# EAGLE board NinjaPCB_ver2.0-panel2x3-GTP (EAGLE 6.6.0), part 1 of 4
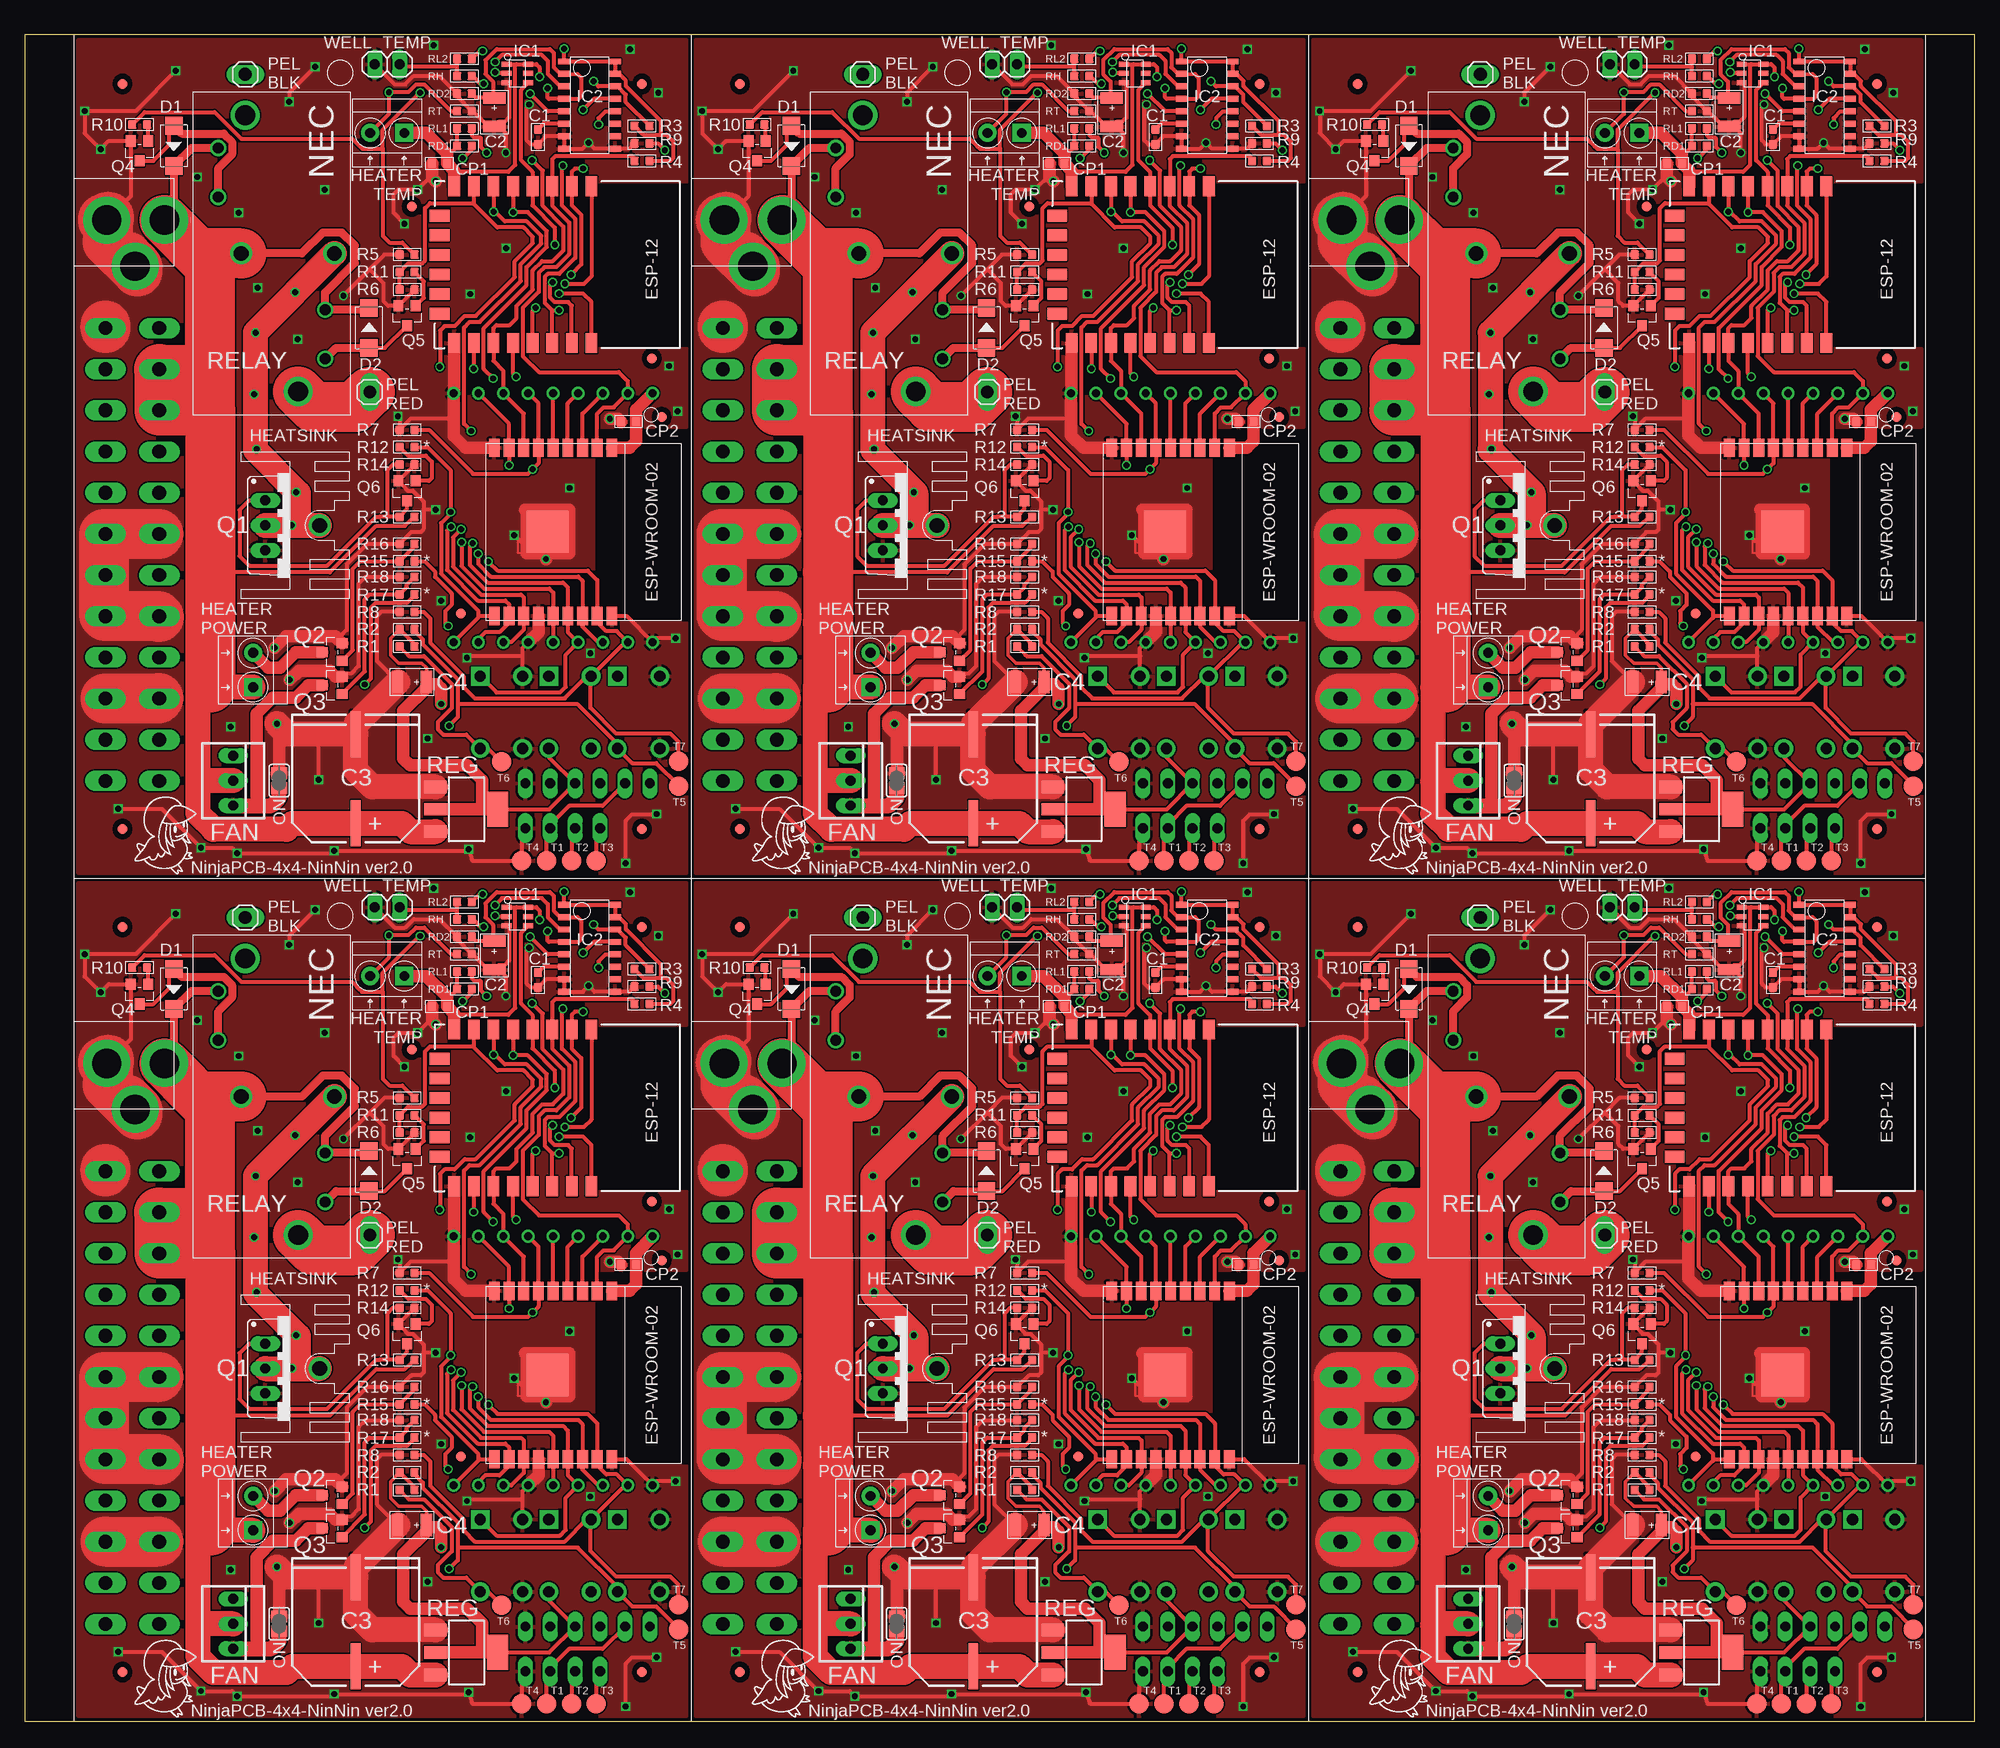
[diagram p0: board, top side]
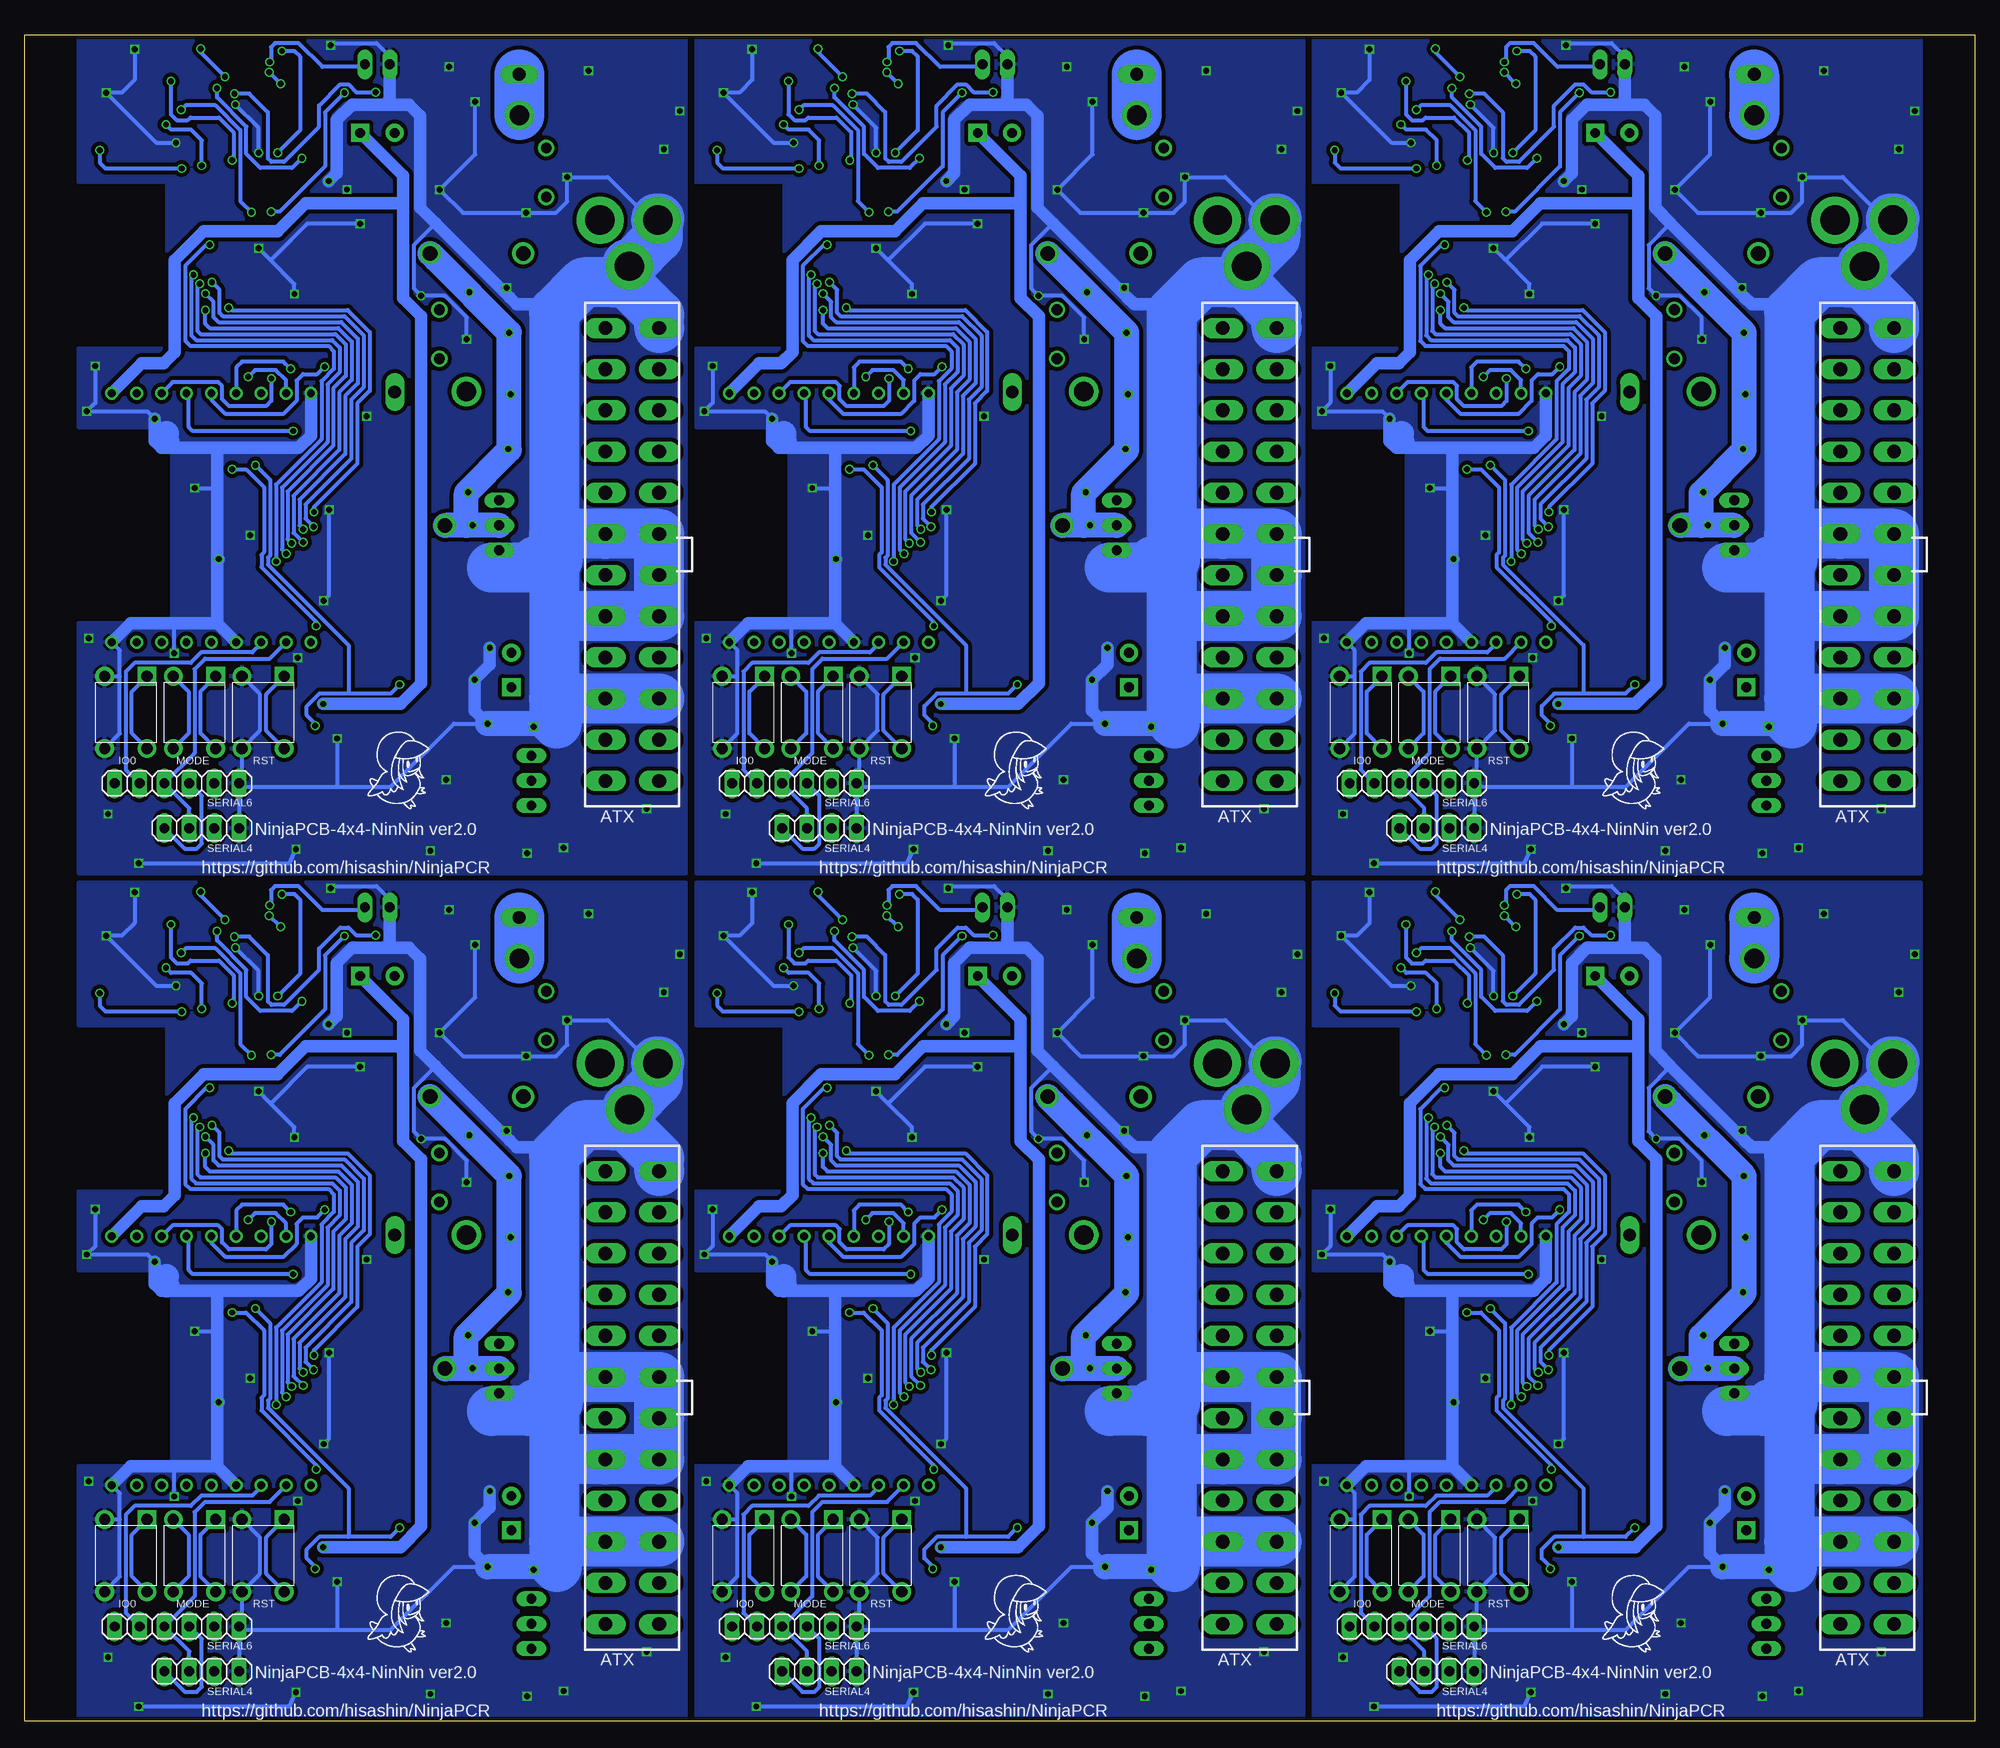
[diagram p1: board, bottom side, seen from below]

Size 199 x 172 mm. Coordinates in mm from the lower left corner, seen from the top.
Outline: 199,172 0,172 0,0 199,0 199,172
Copper layers (1*16): Top 0.035mm / dielectric 1.5mm / Bottom 0.035mm
Design rules "SeeedStudio_2layer_DRU_no_angle_20140221": minimum track width 6mil, minimum drill 12mil, track to track 6mil, track to pad 6mil, pad to pad 6mil, via to via 6mil, smd to smd 0mil, copper to edge 10mil, drill to drill 10mil, minimum pad ring 10mil, minimum via ring 6mil, stop-mask expansion 2mil, vias tented up to drill 100mil, thermal gap 10mil

## Footprints (pad centres in the part's own frame; a part is rotated, then mirrored left to right if it is on the bottom)
ATX24 = drill 1.4 long: 1 23.1,-2.75; 2 18.9,-2.75; 3 14.7,-2.75; 4 10.5,-2.75; 5 6.3,-2.75; 6 2.1,-2.75; 7 -2.1,-2.75; 8 -6.3,-2.75; 9 -10.5,-2.75; 10 -14.7,-2.75; 11 -18.9,-2.75; 12 -23.1,-2.75; 13 23.1,2.75; 14 18.9,2.75; 15 14.7,2.75; 16 10.5,2.75; 17 6.3,2.75; 18 2.1,2.75; 19 -2.1,2.75; 20 -6.3,2.75; 21 -10.5,2.75; 22 -14.7,2.75; 23 -18.9,2.75; 24 -23.1,2.75
C0603 = smd 0.889 x 0.889: 1 0,0.762; 2 0,-0.762
AVX-B = smd 1.143 x 2.286: + -1.46,0; - 1.46,0
CAP_SMD_AL_D125 = smd 1 x 4.7: P$M 0,-4.55; P$P 0,4.55
DO-214AC = smd 1.8 x 1.77: 1 -2.042,0; 2 2.042,0
ESP-12F = smd 2 x 1.2: 1 -8,3.48; 2 -8,1.48; 3 -8,-0.52; 4 -8,-2.52; 5 -8,-4.52; 6 -8,-6.52; 7 -8,-8.52; 8 -8,-10.52; 15 8,-10.52; 16 8,-8.52; 17 8,-6.52; 18 8,-4.52; 19 8,-2.52; 20 8,-0.52; 21 8,1.48; 22 8,3.48 | smd 1.2 x 2: 9 -5,-12; 10 -3,-12; 11 -1,-12; 12 1,-12; 13 3,-12; 14 5,-12
ESP-WROOM-02 = smd 1.85 x 1.1: P$1 -8.575,12.9; P$2 -8.575,11.4; P$3 -8.575,9.9; P$4 -8.575,8.4; P$5 -8.575,6.9; P$6 -8.575,5.4; P$7 -8.575,3.9; P$8 -8.575,2.4; P$9 -8.575,0.9; P$10 8.575,0.9; P$11 8.575,2.4; P$12 8.575,3.9; P$13 8.575,5.4; P$14 8.575,6.9; P$15 8.575,8.4; P$16 8.575,9.9; P$17 8.575,11.4; P$18 8.575,12.9 | smd 4.3 x 4.3: P$19 0,6.33
ESP-WROOM-02-BREAK-NODETAIL = drill 0.8: P$1 -12.7,10.16; P$2 -12.7,7.62; P$3 -12.7,5.08; P$4 -12.7,2.54; P$5 -12.7,0; P$6 -12.7,-2.54; P$7 -12.7,-5.08; P$8 -12.7,-7.62; P$9 -12.7,-10.16; P$10 12.7,-10.16; P$11 12.7,-7.62; P$12 12.7,-5.08; P$13 12.7,-2.54; P$14 12.7,0; P$15 12.7,2.54; P$16 12.7,5.08; P$17 12.7,7.62; P$18 12.7,10.16
22-23-2031 = drill 1 long: 1 -2.54,0; 2 0,0; 3 2.54,0
SJ = smd 1.168 x 1.6: 1 -0.762,0; 2 0.762,0
H2-3.5-7.0X7.0MM = drill 1 pad 1.85 square: 1 -1.75,0 | drill 1 pad 1.85: 2 1.75,0
HEAT11PB015 = drill 1.5: P$1 0,3
SOT-23-6 = smd 0.5 x 1: P$1 -0.95,-1.1; P$2 0,-1.1; P$3 0.95,-1.1; P$4 0.95,1.1; P$5 0,1.1; P$6 -0.95,1.1
SOP-16 = smd 0.6 x 1.2: P$1 -4.445,-2.6; P$2 -3.175,-2.6; P$3 -1.905,-2.6; P$4 -0.635,-2.6; P$5 0.635,-2.6; P$6 1.905,-2.6; P$7 3.175,-2.6; P$8 4.445,-2.6; P$9 4.445,2.6; P$10 3.175,2.6; P$11 1.905,2.6; P$12 0.635,2.6; P$13 -0.635,2.6; P$14 -1.905,2.6; P$15 -3.175,2.6; P$16 -4.445,2.6
SW4-6.0X6.0X5.0MM = drill 1.143 pad 1.905 square: 1 -3.683,2.159 | drill 1.143 pad 1.905: 2 -3.683,-2.159; 3 3.683,-2.159; 4 3.683,2.159
PJ-102A-NOOUT = drill 3 pad 4.8: RING 0.1,-3.39; RING_SW -4.6,-6.29; TIP 0.1,-9.29
1X01LONG = drill 1.3 long: 1 0,0
TO220BV = drill 1.016 long: D 0,-2.54; G -2.54,-2.54; S 2.54,-2.54
SOT-23 = smd 1.016 x 1.143: 1 -0.889,-1.016; 2 0.889,-1.016; 3 0,1.016
R0603 = smd 0.889 x 0.889: 1 0,0.762; 2 0,-0.762
SOT-223 = smd 1.27 x 2.286: 1 -2.286,-3.175; 2 0,-3.175; 3 2.286,-3.175 | smd 3.556 x 2.159: TER 0,3.175
NEC-EP2 = drill 2: P$1 -14.1,-2.7; P$8 14.1,2.7 | drill 1.1: P$2 -10.75,-5.45; P$3 -5.75,-5.45; P$6 5.75,5.45; P$7 10.75,5.45 | drill 1.5: P$4 0,-3.1; P$5 0,6.4
1X06 = drill 1.016 long: 1 -6.35,0; 2 -3.81,0; 3 -1.27,0; 4 1.27,0; 5 3.81,0; 6 6.35,0
1X04 = drill 1.016 long: 1 -3.81,0; 2 -1.27,0; 3 1.27,0; 4 3.81,0
TP20R = smd 2 x 2: TP 0,0
FIDUCIAL_1MM = smd 1 x 1: 1 0,0
1X02 = drill 1.016 long: 1 -1.27,0; 2 1.27,0

## Placement (x,y rotation side)
ATX  ATX24NH  [ATX24]  11,33 270 bottom
ATX1  ATX24NH  [ATX24]  74,33 270 bottom
ATX2  ATX24NH  [ATX24]  137,33 270 bottom
ATX3  ATX24NH  [ATX24]  11,119 270 bottom
ATX4  ATX24NH  [ATX24]  74,119 270 bottom
ATX5  ATX24NH  [ATX24]  137,119 270 bottom
C1  100nf  [C0603]  52.39,75.6 180 top
C2  22uf  [AVX-B]  47.93,78.11 270 top
C3  CAP_SMDAL_1000UF_25V  [CAP_SMD_AL_D125]  33.79,10.13 180 top
C4  22uf  [AVX-B]  39.54,19.99 180 top
C5  22uf  [AVX-B]  102.54,19.99 180 top
C6  CAP_SMDAL_1000UF_25V  [CAP_SMD_AL_D125]  96.79,10.13 180 top
C7  100nf  [C0603]  115.39,75.6 180 top
C8  22uf  [AVX-B]  110.93,78.11 270 top
C9  22uf  [AVX-B]  165.54,19.99 180 top
C10  CAP_SMDAL_1000UF_25V  [CAP_SMD_AL_D125]  159.79,10.13 180 top
C11  100nf  [C0603]  178.39,75.6 180 top
C12  22uf  [AVX-B]  173.93,78.11 270 top
C13  22uf  [AVX-B]  39.54,105.99 180 top
C14  CAP_SMDAL_1000UF_25V  [CAP_SMD_AL_D125]  33.79,96.13 180 top
C15  100nf  [C0603]  52.39,161.6 180 top
C16  22uf  [AVX-B]  47.93,164.1 270 top
C17  22uf  [AVX-B]  102.54,105.99 180 top
C18  CAP_SMDAL_1000UF_25V  [CAP_SMD_AL_D125]  96.79,96.13 180 top
C19  100nf  [C0603]  115.39,161.6 180 top
C20  22uf  [AVX-B]  110.93,164.1 270 top
C21  22uf  [AVX-B]  165.54,105.99 180 top
C22  CAP_SMDAL_1000UF_25V  [CAP_SMD_AL_D125]  159.79,96.13 180 top
C23  100nf  [C0603]  178.39,161.6 180 top
C24  22uf  [AVX-B]  173.93,164.1 270 top
CP1  100nf  [C0603]  42.34,72.9 270 top
CP2  100nf  [C0603]  61.63,46.56 90 top
CP3  100nf  [C0603]  105.34,72.9 270 top
CP4  100nf  [C0603]  124.63,46.56 90 top
CP5  100nf  [C0603]  168.34,72.9 270 top
CP6  100nf  [C0603]  187.63,46.56 90 top
CP7  100nf  [C0603]  42.34,158.9 270 top
CP8  100nf  [C0603]  61.63,132.56 90 top
CP9  100nf  [C0603]  105.34,158.9 270 top
CP10  100nf  [C0603]  124.63,132.56 90 top
CP11  100nf  [C0603]  168.34,158.9 270 top
CP12  100nf  [C0603]  187.63,132.56 90 top
D1  1N4007  [DO-214AC]  15.24,74.68 270 top
D2  1N4007  [DO-214AC]  35.15,56.11 90 top
D3  1N4007  [DO-214AC]  78.24,74.68 270 top
D4  1N4007  [DO-214AC]  98.15,56.11 90 top
D5  1N4007  [DO-214AC]  141.24,74.68 270 top
D6  1N4007  [DO-214AC]  161.15,56.11 90 top
D7  1N4007  [DO-214AC]  15.24,160.68 270 top
D8  1N4007  [DO-214AC]  35.15,142.11 90 top
D9  1N4007  [DO-214AC]  78.24,160.68 270 top
D10  1N4007  [DO-214AC]  98.15,142.11 90 top
D11  1N4007  [DO-214AC]  141.24,160.68 270 top
D12  1N4007  [DO-214AC]  161.15,142.11 90 top
ESP-1  ESP-12F  [ESP-12F]  117.36,62.56 270 top
ESP-2  ESP-12F  [ESP-12F]  180.36,62.56 270 top
ESP-3  ESP-12F  [ESP-12F]  54.36,148.56 270 top
ESP-4  ESP-12F  [ESP-12F]  117.36,148.56 270 top
ESP-5  ESP-12F  [ESP-12F]  180.36,148.56 270 top
ESP-12  ESP-12F  [ESP-12F]  54.36,62.56 270 top
ESP-WROOM-01  ESP-WROOM-02  [ESP-WROOM-02]  110.03,35.3 270 top
ESP-WROOM-02  ESP-WROOM-02  [ESP-WROOM-02]  47.03,35.3 270 top
ESP-WROOM-02-BREAK  ESP-WROOM-02-BREAKND  [ESP-WROOM-02-BREAK-NODETAIL]  53.93,36.75 270 top
ESP-WROOM-02-BREAK1  ESP-WROOM-02-BREAKND  [ESP-WROOM-02-BREAK-NODETAIL]  116.93,36.75 270 top
ESP-WROOM-02-BREAK2  ESP-WROOM-02-BREAKND  [ESP-WROOM-02-BREAK-NODETAIL]  179.93,36.75 270 top
ESP-WROOM-02-BREAK3  ESP-WROOM-02-BREAKND  [ESP-WROOM-02-BREAK-NODETAIL]  53.93,122.75 270 top
ESP-WROOM-02-BREAK4  ESP-WROOM-02-BREAKND  [ESP-WROOM-02-BREAK-NODETAIL]  116.93,122.75 270 top
ESP-WROOM-02-BREAK5  ESP-WROOM-02-BREAKND  [ESP-WROOM-02-BREAK-NODETAIL]  179.93,122.75 270 top
ESP-WROOM-03  ESP-WROOM-02  [ESP-WROOM-02]  173.03,35.3 270 top
ESP-WROOM-04  ESP-WROOM-02  [ESP-WROOM-02]  47.03,121.3 270 top
ESP-WROOM-05  ESP-WROOM-02  [ESP-WROOM-02]  110.03,121.3 270 top
ESP-WROOM-06  ESP-WROOM-02  [ESP-WROOM-02]  173.03,121.3 270 top
FAN  22-23-2031  [22-23-2031]  21.29,9.93 270 top
FAN1  22-23-2031  [22-23-2031]  84.29,9.93 270 top
FAN2  22-23-2031  [22-23-2031]  147.29,9.93 270 top
FAN3  22-23-2031  [22-23-2031]  21.29,95.93 270 top
FAN4  22-23-2031  [22-23-2031]  84.29,95.93 270 top
FAN5  22-23-2031  [22-23-2031]  147.29,95.93 270 top
FAN_ON  [SJ]  25.98,9.93 270 top
FAN_ON1  [SJ]  88.98,9.93 270 top
FAN_ON2  [SJ]  151.98,9.93 270 top
FAN_ON3  [SJ]  25.98,95.93 270 top
FAN_ON4  [SJ]  88.98,95.93 270 top
FAN_ON5  [SJ]  151.98,95.93 270 top
HEATER_POWER  [H2-3.5-7.0X7.0MM]  23.32,21.22 90 top
HEATER_POWER1  [H2-3.5-7.0X7.0MM]  86.32,21.22 90 top
HEATER_POWER2  [H2-3.5-7.0X7.0MM]  149.32,21.22 90 top
HEATER_POWER3  [H2-3.5-7.0X7.0MM]  23.32,107.22 90 top
HEATER_POWER4  [H2-3.5-7.0X7.0MM]  86.32,107.22 90 top
HEATER_POWER5  [H2-3.5-7.0X7.0MM]  149.32,107.22 90 top
HEATER_TEMP  [H2-3.5-7.0X7.0MM]  37,76 180 top
HEATER_TEMP1  [H2-3.5-7.0X7.0MM]  100,76 180 top
HEATER_TEMP2  [H2-3.5-7.0X7.0MM]  163,76 180 top
HEATER_TEMP3  [H2-3.5-7.0X7.0MM]  37,162 180 top
HEATER_TEMP4  [H2-3.5-7.0X7.0MM]  100,162 180 top
HEATER_TEMP5  [H2-3.5-7.0X7.0MM]  163,162 180 top
HEATSINK  HEAT111PB015  [HEAT11PB015]  27.11,35.97 270 top
HEATSINK1  HEAT111PB015  [HEAT11PB015]  90.11,35.97 270 top
HEATSINK2  HEAT111PB015  [HEAT11PB015]  153.11,35.97 270 top
HEATSINK3  HEAT111PB015  [HEAT11PB015]  27.11,121.97 270 top
HEATSINK4  HEAT111PB015  [HEAT11PB015]  90.11,121.97 270 top
HEATSINK5  HEAT111PB015  [HEAT11PB015]  153.11,121.97 270 top
IC1  ANALOGSW_AD_SOT23-6  [SOT-23-6]  50.29,82.07 270 top
IC2  NAU7802  [SOP-16]  57.65,78.84 270 top
IC3  NAU7802  [SOP-16]  120.65,78.84 270 top
IC4  ANALOGSW_AD_SOT23-6  [SOT-23-6]  113.29,82.07 270 top
IC5  NAU7802  [SOP-16]  183.65,78.84 270 top
IC6  ANALOGSW_AD_SOT23-6  [SOT-23-6]  176.29,82.07 270 top
IC7  NAU7802  [SOP-16]  57.65,164.84 270 top
IC8  ANALOGSW_AD_SOT23-6  [SOT-23-6]  50.29,168.07 270 top
IC9  NAU7802  [SOP-16]  120.65,164.84 270 top
IC10  ANALOGSW_AD_SOT23-6  [SOT-23-6]  113.29,168.07 270 top
IC11  NAU7802  [SOP-16]  183.65,164.84 270 top
IC12  ANALOGSW_AD_SOT23-6  [SOT-23-6]  176.29,168.07 270 top
IO0  [SW4-6.0X6.0X5.0MM]  62.66,16.89 270 bottom
IO1  [SW4-6.0X6.0X5.0MM]  125.66,16.89 270 bottom
IO2  [SW4-6.0X6.0X5.0MM]  188.66,16.89 270 bottom
IO3  [SW4-6.0X6.0X5.0MM]  62.66,102.89 270 bottom
IO4  [SW4-6.0X6.0X5.0MM]  125.66,102.89 270 bottom
IO5  [SW4-6.0X6.0X5.0MM]  188.66,102.89 270 bottom
JACK  2.1MMJACKTHM-NOOUT  [PJ-102A-NOOUT]  5,67 90 top
JACK1  2.1MMJACKTHM-NOOUT  [PJ-102A-NOOUT]  68,67 90 top
JACK2  2.1MMJACKTHM-NOOUT  [PJ-102A-NOOUT]  131,67 90 top
JACK3  2.1MMJACKTHM-NOOUT  [PJ-102A-NOOUT]  5,153 90 top
JACK4  2.1MMJACKTHM-NOOUT  [PJ-102A-NOOUT]  68,153 90 top
JACK5  2.1MMJACKTHM-NOOUT  [PJ-102A-NOOUT]  131,153 90 top
MODE  [SW4-6.0X6.0X5.0MM]  55.66,16.89 270 bottom
MODE1  [SW4-6.0X6.0X5.0MM]  118.66,16.89 270 bottom
MODE2  [SW4-6.0X6.0X5.0MM]  181.66,16.89 270 bottom
MODE3  [SW4-6.0X6.0X5.0MM]  55.66,102.89 270 bottom
MODE4  [SW4-6.0X6.0X5.0MM]  118.66,102.89 270 bottom
MODE5  [SW4-6.0X6.0X5.0MM]  181.66,102.89 270 bottom
PEL_BLK  [1X01LONG]  22.53,81.98 0 top
PEL_BLK1  [1X01LONG]  85.53,81.98 0 top
PEL_BLK2  [1X01LONG]  148.53,81.98 0 top
PEL_BLK3  [1X01LONG]  22.53,167.98 0 top
PEL_BLK4  [1X01LONG]  85.53,167.98 0 top
PEL_BLK5  [1X01LONG]  148.53,167.98 0 top
PEL_RED  [1X01LONG]  35.23,49.58 270 top
PEL_RED1  [1X01LONG]  98.23,49.58 270 top
PEL_RED2  [1X01LONG]  161.23,49.58 270 top
PEL_RED3  [1X01LONG]  35.23,135.58 270 top
PEL_RED4  [1X01LONG]  98.23,135.58 270 top
PEL_RED5  [1X01LONG]  161.23,135.58 270 top
Q1  IRLB3813PBF  [TO220BV]  27.11,35.97 270 top
Q2  CJ2302  [SOT-23]  31.39,23.04 90 top
Q3  CJ2302  [SOT-23]  31.39,19.66 90 top
Q4  S9013  [SOT-23]  11.74,74.16 180 top
Q5  S9013  [SOT-23]  39.04,57.35 180 top
Q6  S9013  [SOT-23]  39.04,39.5 180 top
Q7  S9013  [SOT-23]  74.74,74.16 180 top
Q8  S9013  [SOT-23]  102.04,57.35 180 top
Q9  S9013  [SOT-23]  102.04,39.5 180 top
Q10  CJ2302  [SOT-23]  94.39,23.04 90 top
Q11  CJ2302  [SOT-23]  94.39,19.66 90 top
Q12  IRLB3813PBF  [TO220BV]  90.11,35.97 270 top
Q13  S9013  [SOT-23]  137.74,74.16 180 top
Q14  S9013  [SOT-23]  165.04,57.35 180 top
Q15  S9013  [SOT-23]  165.04,39.5 180 top
Q16  CJ2302  [SOT-23]  157.39,23.04 90 top
Q17  CJ2302  [SOT-23]  157.39,19.66 90 top
Q18  IRLB3813PBF  [TO220BV]  153.11,35.97 270 top
Q19  S9013  [SOT-23]  11.74,160.16 180 top
Q20  S9013  [SOT-23]  39.04,143.35 180 top
Q21  S9013  [SOT-23]  39.04,125.5 180 top
Q22  CJ2302  [SOT-23]  31.39,109.04 90 top
Q23  CJ2302  [SOT-23]  31.39,105.66 90 top
Q24  IRLB3813PBF  [TO220BV]  27.11,121.97 270 top
Q25  S9013  [SOT-23]  74.74,160.16 180 top
Q26  S9013  [SOT-23]  102.04,143.35 180 top
Q27  S9013  [SOT-23]  102.04,125.5 180 top
Q28  CJ2302  [SOT-23]  94.39,109.04 90 top
Q29  CJ2302  [SOT-23]  94.39,105.66 90 top
Q30  IRLB3813PBF  [TO220BV]  90.11,121.97 270 top
Q31  S9013  [SOT-23]  137.74,160.16 180 top
Q32  S9013  [SOT-23]  165.04,143.35 180 top
Q33  S9013  [SOT-23]  165.04,125.5 180 top
Q34  CJ2302  [SOT-23]  157.39,109.04 90 top
Q35  CJ2302  [SOT-23]  157.39,105.66 90 top
Q36  IRLB3813PBF  [TO220BV]  153.11,121.97 270 top
R1  10K 1/10W  [R0603]  39.04,23.6 270 top
R2  10K 1/10W  [R0603]  39.04,25.37 90 top
R3  10K 1/10W  [R0603]  63,76.71 90 top
R4  10K 1/10W  [R0603]  63,73.15 270 top
R5  10K 1/10W  [R0603]  39.04,63.58 90 top
R6  10K 1/10W  [R0603]  39.04,60.02 270 top
R7  10K 1/10W  [R0603]  39.04,45.72 90 top
R8  10K 1/10W  [R0603]  39.04,27.15 90 top
R9  10K 1/10W  [R0603]  63,74.93 90 top
R10  10K 1/10W  [R0603]  11.74,76.85 90 top
R11  10K 1/10W  [R0603]  39.04,61.8 270 top
R12  1K 1/10W  [R0603]  39.04,43.94 270 top
R13  10K 1/10W  [R0603]  39.04,36.83 90 top
R14  10K 1/10W  [R0603]  39.04,42.16 270 top
R15  1K 1/10W  [R0603]  39.04,32.31 270 top
R16  10K 1/10W  [R0603]  39.04,34.09 90 top
R17  1K 1/10W  [R0603]  39.04,28.93 270 top
R18  10K 1/10W  [R0603]  39.04,30.71 90 top
R19  10K 1/10W  [R0603]  102.04,23.6 270 top
R20  1K 1/10W  [R0603]  102.04,28.93 270 top
R21  1K 1/10W  [R0603]  102.04,32.31 270 top
R22  10K 1/10W  [R0603]  102.04,27.15 90 top
R23  10K 1/10W  [R0603]  102.04,25.37 90 top
R24  10K 1/10W  [R0603]  102.04,45.72 90 top
R25  10K 1/10W  [R0603]  102.04,34.09 90 top
R26  10K 1/10W  [R0603]  102.04,30.71 90 top
R27  1K 1/10W  [R0603]  102.04,43.94 270 top
R28  10K 1/10W  [R0603]  102.04,36.83 90 top
R29  10K 1/10W  [R0603]  102.04,42.16 270 top
R30  10K 1/10W  [R0603]  74.74,76.85 90 top
R31  10K 1/10W  [R0603]  102.04,61.8 270 top
R32  10K 1/10W  [R0603]  126,73.15 270 top
R33  10K 1/10W  [R0603]  102.04,63.58 90 top
R34  10K 1/10W  [R0603]  102.04,60.02 270 top
R35  10K 1/10W  [R0603]  126,76.71 90 top
R36  10K 1/10W  [R0603]  126,74.93 90 top
R37  10K 1/10W  [R0603]  165.04,23.6 270 top
R38  1K 1/10W  [R0603]  165.04,28.93 270 top
R39  1K 1/10W  [R0603]  165.04,32.31 270 top
R40  10K 1/10W  [R0603]  165.04,27.15 90 top
R41  10K 1/10W  [R0603]  165.04,25.37 90 top
R42  10K 1/10W  [R0603]  165.04,45.72 90 top
R43  10K 1/10W  [R0603]  165.04,34.09 90 top
R44  10K 1/10W  [R0603]  165.04,30.71 90 top
R45  1K 1/10W  [R0603]  165.04,43.94 270 top
R46  10K 1/10W  [R0603]  165.04,36.83 90 top
R47  10K 1/10W  [R0603]  165.04,42.16 270 top
R48  10K 1/10W  [R0603]  137.74,76.85 90 top
R49  10K 1/10W  [R0603]  165.04,61.8 270 top
R50  10K 1/10W  [R0603]  189,73.15 270 top
R51  10K 1/10W  [R0603]  165.04,63.58 90 top
R52  10K 1/10W  [R0603]  165.04,60.02 270 top
R53  10K 1/10W  [R0603]  189,76.71 90 top
R54  10K 1/10W  [R0603]  189,74.93 90 top
R55  10K 1/10W  [R0603]  39.04,109.6 270 top
R56  1K 1/10W  [R0603]  39.04,114.93 270 top
R57  1K 1/10W  [R0603]  39.04,118.31 270 top
R58  10K 1/10W  [R0603]  39.04,113.15 90 top
R59  10K 1/10W  [R0603]  39.04,111.37 90 top
R60  10K 1/10W  [R0603]  39.04,131.72 90 top
R61  10K 1/10W  [R0603]  39.04,120.09 90 top
R62  10K 1/10W  [R0603]  39.04,116.71 90 top
R63  1K 1/10W  [R0603]  39.04,129.94 270 top
R64  10K 1/10W  [R0603]  39.04,122.83 90 top
R65  10K 1/10W  [R0603]  39.04,128.16 270 top
R66  10K 1/10W  [R0603]  11.74,162.85 90 top
R67  10K 1/10W  [R0603]  39.04,147.8 270 top
R68  10K 1/10W  [R0603]  63,159.15 270 top
R69  10K 1/10W  [R0603]  39.04,149.58 90 top
R70  10K 1/10W  [R0603]  39.04,146.02 270 top
R71  10K 1/10W  [R0603]  63,162.71 90 top
R72  10K 1/10W  [R0603]  63,160.93 90 top
R73  10K 1/10W  [R0603]  102.04,109.6 270 top
R74  1K 1/10W  [R0603]  102.04,114.93 270 top
R75  1K 1/10W  [R0603]  102.04,118.31 270 top
R76  10K 1/10W  [R0603]  102.04,113.15 90 top
R77  10K 1/10W  [R0603]  102.04,111.37 90 top
R78  10K 1/10W  [R0603]  102.04,131.72 90 top
R79  10K 1/10W  [R0603]  102.04,120.09 90 top
R80  10K 1/10W  [R0603]  102.04,116.71 90 top
R81  1K 1/10W  [R0603]  102.04,129.94 270 top
R82  10K 1/10W  [R0603]  102.04,122.83 90 top
R83  10K 1/10W  [R0603]  102.04,128.16 270 top
R84  10K 1/10W  [R0603]  74.74,162.85 90 top
R85  10K 1/10W  [R0603]  102.04,147.8 270 top
R86  10K 1/10W  [R0603]  126,159.15 270 top
R87  10K 1/10W  [R0603]  102.04,149.58 90 top
R88  10K 1/10W  [R0603]  102.04,146.02 270 top
R89  10K 1/10W  [R0603]  126,162.71 90 top
R90  10K 1/10W  [R0603]  126,160.93 90 top
R91  10K 1/10W  [R0603]  165.04,109.6 270 top
R92  1K 1/10W  [R0603]  165.04,114.93 270 top
R93  1K 1/10W  [R0603]  165.04,118.31 270 top
R94  10K 1/10W  [R0603]  165.04,113.15 90 top
R95  10K 1/10W  [R0603]  165.04,111.37 90 top
R96  10K 1/10W  [R0603]  165.04,131.72 90 top
R97  10K 1/10W  [R0603]  165.04,120.09 90 top
R98  10K 1/10W  [R0603]  165.04,116.71 90 top
R99  1K 1/10W  [R0603]  165.04,129.94 270 top
R100  10K 1/10W  [R0603]  165.04,122.83 90 top
R101  10K 1/10W  [R0603]  165.04,128.16 270 top
R102  10K 1/10W  [R0603]  137.74,162.85 90 top
R103  10K 1/10W  [R0603]  165.04,147.8 270 top
R104  10K 1/10W  [R0603]  189,159.15 270 top
R105  10K 1/10W  [R0603]  165.04,149.58 90 top
R106  10K 1/10W  [R0603]  165.04,146.02 270 top
R107  10K 1/10W  [R0603]  189,162.71 90 top
R108  10K 1/10W  [R0603]  189,160.93 90 top
RD1  15K HP  [R0603]  44.88,74.68 270 top
RD2  15K HP  [R0603]  44.88,80.01 270 top
RD3  15K HP  [R0603]  107.88,74.68 270 top
RD4  15K HP  [R0603]  107.88,80.01 270 top
RD5  15K HP  [R0603]  170.88,74.68 270 top
RD6  15K HP  [R0603]  170.88,80.01 270 top
RD7  15K HP  [R0603]  44.88,160.68 270 top
RD8  15K HP  [R0603]  44.88,166.01 270 top
RD9  15K HP  [R0603]  107.88,160.68 270 top
RD10  15K HP  [R0603]  107.88,166.01 270 top
RD11  15K HP  [R0603]  170.88,160.68 270 top
RD12  15K HP  [R0603]  170.88,166.01 270 top
REG  CJT1117-3.3-SOT223  [SOT-223]  45.1,7.01 270 top
REG1  CJT1117-3.3-SOT223  [SOT-223]  108.1,7.01 270 top
REG2  CJT1117-3.3-SOT223  [SOT-223]  171.1,7.01 270 top
REG3  CJT1117-3.3-SOT223  [SOT-223]  45.1,93.01 270 top
REG4  CJT1117-3.3-SOT223  [SOT-223]  108.1,93.01 270 top
REG5  CJT1117-3.3-SOT223  [SOT-223]  171.1,93.01 270 top
RELAY  NEC-RELAY2EP2  [NEC-EP2]  25.22,63.7 270 top
RELAY1  NEC-RELAY2EP2  [NEC-EP2]  88.22,63.7 270 top
RELAY2  NEC-RELAY2EP2  [NEC-EP2]  151.22,63.7 270 top
RELAY3  NEC-RELAY2EP2  [NEC-EP2]  25.22,149.7 270 top
RELAY4  NEC-RELAY2EP2  [NEC-EP2]  88.22,149.7 270 top
RELAY5  NEC-RELAY2EP2  [NEC-EP2]  151.22,149.7 270 top
RH  15K HP  [R0603]  44.88,81.79 270 top
RH1  15K HP  [R0603]  107.88,81.79 270 top
RH2  15K HP  [R0603]  170.88,81.79 270 top
RH3  15K HP  [R0603]  44.88,167.79 270 top
RH4  15K HP  [R0603]  107.88,167.79 270 top
RH5  15K HP  [R0603]  170.88,167.79 270 top
RL1  15K HP  [R0603]  44.88,76.45 90 top
RL2  15K HP  [R0603]  44.88,83.57 270 top
RL3  15K HP  [R0603]  107.88,83.57 270 top
RL4  15K HP  [R0603]  107.88,76.45 90 top
RL5  15K HP  [R0603]  170.88,83.57 270 top
RL6  15K HP  [R0603]  170.88,76.45 90 top
RL7  15K HP  [R0603]  44.88,169.57 270 top
RL8  15K HP  [R0603]  44.88,162.45 90 top
RL9  15K HP  [R0603]  107.88,169.57 270 top
RL10  15K HP  [R0603]  107.88,162.45 90 top
RL11  15K HP  [R0603]  170.88,169.57 270 top
RL12  15K HP  [R0603]  170.88,162.45 90 top
RST  [SW4-6.0X6.0X5.0MM]  48.66,16.89 270 bottom
RST1  [SW4-6.0X6.0X5.0MM]  111.66,16.89 270 bottom
RST2  [SW4-6.0X6.0X5.0MM]  174.66,16.89 270 bottom
RST3  [SW4-6.0X6.0X5.0MM]  48.66,102.89 270 bottom
RST4  [SW4-6.0X6.0X5.0MM]  111.66,102.89 270 bottom
RST5  [SW4-6.0X6.0X5.0MM]  174.66,102.89 270 bottom
RT  15K HP  [R0603]  44.88,78.23 90 top
RT1  15K HP  [R0603]  107.88,78.23 90 top
RT2  15K HP  [R0603]  170.88,78.23 90 top
RT3  15K HP  [R0603]  44.88,164.23 90 top
RT4  15K HP  [R0603]  107.88,164.23 90 top
RT5  15K HP  [R0603]  170.88,164.23 90 top
SERIAL1  [1X06]  120.45,9.65 0 bottom
SERIAL2  [1X04]  117.91,5.08 0 bottom
SERIAL3  [1X06]  183.45,9.65 0 bottom
SERIAL4  [1X04]  54.91,5.08 0 bottom
SERIAL5  [1X04]  180.91,5.08 0 bottom
SERIAL6  [1X06]  57.45,9.65 0 bottom
SERIAL7  [1X06]  57.45,95.65 0 bottom
SERIAL8  [1X04]  54.91,91.08 0 bottom
SERIAL9  [1X06]  120.45,95.65 0 bottom
SERIAL10  [1X04]  117.91,91.08 0 bottom
SERIAL11  [1X06]  183.45,95.65 0 bottom
SERIAL12  [1X04]  180.91,91.08 0 bottom
T1  TPTP20R  [TP20R]  53.26,1.78 0 top
T2  TPTP20R  [TP20R]  55.8,1.78 0 top
T3  TPTP20R  [TP20R]  58.34,1.78 0 top
T4  TPTP20R  [TP20R]  50.72,1.78 0 top
T5  TPTP20R  [TP20R]  66.72,9.35 0 top
T6  TPTP20R  [TP20R]  48.66,11.84 0 top
T7  TPTP20R  [TP20R]  66.72,11.89 0 top
T8  TPTP20R  [TP20R]  116.26,1.78 0 top
T9  TPTP20R  [TP20R]  118.8,1.78 0 top
T10  TPTP20R  [TP20R]  121.34,1.78 0 top
T11  TPTP20R  [TP20R]  113.72,1.78 0 top
T12  TPTP20R  [TP20R]  129.72,9.35 0 top
T13  TPTP20R  [TP20R]  111.66,11.84 0 top
T14  TPTP20R  [TP20R]  129.72,11.89 0 top
T15  TPTP20R  [TP20R]  179.26,1.78 0 top
T16  TPTP20R  [TP20R]  181.8,1.78 0 top
T17  TPTP20R  [TP20R]  184.34,1.78 0 top
T18  TPTP20R  [TP20R]  176.72,1.78 0 top
T19  TPTP20R  [TP20R]  192.72,9.35 0 top
T20  TPTP20R  [TP20R]  174.66,11.84 0 top
T21  TPTP20R  [TP20R]  192.72,11.89 0 top
T22  TPTP20R  [TP20R]  53.26,87.78 0 top
T23  TPTP20R  [TP20R]  55.8,87.78 0 top
T24  TPTP20R  [TP20R]  58.34,87.78 0 top
T25  TPTP20R  [TP20R]  50.72,87.78 0 top
T26  TPTP20R  [TP20R]  66.72,95.35 0 top
T27  TPTP20R  [TP20R]  48.66,97.84 0 top
T28  TPTP20R  [TP20R]  66.72,97.89 0 top
T29  TPTP20R  [TP20R]  116.26,87.78 0 top
T30  TPTP20R  [TP20R]  118.8,87.78 0 top
T31  TPTP20R  [TP20R]  121.34,87.78 0 top
T32  TPTP20R  [TP20R]  113.72,87.78 0 top
T33  TPTP20R  [TP20R]  129.72,95.35 0 top
T34  TPTP20R  [TP20R]  111.66,97.84 0 top
T35  TPTP20R  [TP20R]  129.72,97.89 0 top
T36  TPTP20R  [TP20R]  179.26,87.78 0 top
T37  TPTP20R  [TP20R]  181.8,87.78 0 top
T38  TPTP20R  [TP20R]  184.34,87.78 0 top
T39  TPTP20R  [TP20R]  176.72,87.78 0 top
T40  TPTP20R  [TP20R]  192.72,95.35 0 top
T41  TPTP20R  [TP20R]  174.66,97.84 0 top
T42  TPTP20R  [TP20R]  192.72,97.89 0 top
U$1  [TORI_0.25]  11.1,0.28 0 top
U$2  [TORI_0.25]  38.15,6.91 0 bottom
U$3  FIDUCIAL  [FIDUCIAL_1MM]  63,5 0 top
U$4  FIDUCIAL  [FIDUCIAL_1MM]  63,81 0 top
U$5  FIDUCIAL  [FIDUCIAL_1MM]  10,5 0 top
U$6  FIDUCIAL  [FIDUCIAL_1MM]  10,81 0 top
U$7  FIDUCIAL  [FIDUCIAL_1MM]  64,53 0 top
U$8  FIDUCIAL  [FIDUCIAL_1MM]  39.5,68.5 0 top
U$9  FIDUCIAL  [FIDUCIAL_1MM]  65,47 0 top
U$10  FIDUCIAL  [FIDUCIAL_1MM]  44.5,27 0 top
U$11  FIDUCIAL  [FIDUCIAL_1MM]  126,5 0 top
U$12  FIDUCIAL  [FIDUCIAL_1MM]  126,81 0 top
U$13  FIDUCIAL  [FIDUCIAL_1MM]  73,5 0 top
U$14  FIDUCIAL  [FIDUCIAL_1MM]  73,81 0 top
U$15  [TORI_0.25]  74.1,0.28 0 top
U$16  [TORI_0.25]  101.15,6.91 0 bottom
U$17  FIDUCIAL  [FIDUCIAL_1MM]  127,53 0 top
U$18  FIDUCIAL  [FIDUCIAL_1MM]  102.5,68.5 0 top
U$19  FIDUCIAL  [FIDUCIAL_1MM]  128,47 0 top
U$20  FIDUCIAL  [FIDUCIAL_1MM]  107.5,27 0 top
U$21  FIDUCIAL  [FIDUCIAL_1MM]  189,5 0 top
U$22  FIDUCIAL  [FIDUCIAL_1MM]  189,81 0 top
U$23  FIDUCIAL  [FIDUCIAL_1MM]  136,5 0 top
U$24  FIDUCIAL  [FIDUCIAL_1MM]  136,81 0 top
U$25  [TORI_0.25]  137.1,0.28 0 top
U$26  [TORI_0.25]  164.15,6.91 0 bottom
U$27  FIDUCIAL  [FIDUCIAL_1MM]  190,53 0 top
U$28  FIDUCIAL  [FIDUCIAL_1MM]  165.5,68.5 0 top
U$29  FIDUCIAL  [FIDUCIAL_1MM]  191,47 0 top
U$30  FIDUCIAL  [FIDUCIAL_1MM]  170.5,27 0 top
U$31  FIDUCIAL  [FIDUCIAL_1MM]  63,91 0 top
U$32  FIDUCIAL  [FIDUCIAL_1MM]  63,167 0 top
U$33  FIDUCIAL  [FIDUCIAL_1MM]  10,91 0 top
U$34  FIDUCIAL  [FIDUCIAL_1MM]  10,167 0 top
U$35  [TORI_0.25]  11.1,86.28 0 top
U$36  [TORI_0.25]  38.15,92.91 0 bottom
U$37  FIDUCIAL  [FIDUCIAL_1MM]  64,139 0 top
U$38  FIDUCIAL  [FIDUCIAL_1MM]  39.5,154.5 0 top
U$39  FIDUCIAL  [FIDUCIAL_1MM]  65,133 0 top
U$40  FIDUCIAL  [FIDUCIAL_1MM]  44.5,113 0 top
U$41  FIDUCIAL  [FIDUCIAL_1MM]  126,91 0 top
U$42  FIDUCIAL  [FIDUCIAL_1MM]  126,167 0 top
U$43  FIDUCIAL  [FIDUCIAL_1MM]  73,91 0 top
U$44  FIDUCIAL  [FIDUCIAL_1MM]  73,167 0 top
U$45  [TORI_0.25]  74.1,86.28 0 top
U$46  [TORI_0.25]  101.15,92.91 0 bottom
U$47  FIDUCIAL  [FIDUCIAL_1MM]  127,139 0 top
U$48  FIDUCIAL  [FIDUCIAL_1MM]  102.5,154.5 0 top
U$49  FIDUCIAL  [FIDUCIAL_1MM]  128,133 0 top
U$50  FIDUCIAL  [FIDUCIAL_1MM]  107.5,113 0 top
U$51  FIDUCIAL  [FIDUCIAL_1MM]  189,91 0 top
U$52  FIDUCIAL  [FIDUCIAL_1MM]  189,167 0 top
U$53  FIDUCIAL  [FIDUCIAL_1MM]  136,91 0 top
U$54  FIDUCIAL  [FIDUCIAL_1MM]  136,167 0 top
U$55  [TORI_0.25]  137.1,86.28 0 top
U$56  [TORI_0.25]  164.15,92.91 0 bottom
U$57  FIDUCIAL  [FIDUCIAL_1MM]  190,139 0 top
U$58  FIDUCIAL  [FIDUCIAL_1MM]  165.5,154.5 0 top
U$59  FIDUCIAL  [FIDUCIAL_1MM]  191,133 0 top
U$60  FIDUCIAL  [FIDUCIAL_1MM]  170.5,113 0 top
WELL_TEMP  [1X02]  37,83 180 top
WELL_TEMP1  [1X02]  100,83 180 top
WELL_TEMP2  [1X02]  163,83 180 top
WELL_TEMP3  [1X02]  37,169 180 top
WELL_TEMP4  [1X02]  100,169 180 top
WELL_TEMP5  [1X02]  163,169 180 top

## Library data of the parts
ATX ATX1-ATX5 HEATSINK HEATSINK1-HEATSINK5 = PCR-Connector
C1 C7 C11 C15 C19 C23 CP1-CP12 = Seeed-Capacitor; MPN: CC0603KRX7R9BB104
C2 C4 C5 C8 C9 C12 C13 C16 C17 C20 C21 C24 = Seeed-Capacitor; MPN: TAJB226*016#NJ
C3 C6 C10 C14 C18 C22 = Seeed-OPL-2017-01-Capacitor-akita
D1-D12 = Seeed-Diode; MPN: 1N4007
ESP-1-ESP-5 ESP-12 = Seeed-OPL-2017-01-Sensor-camilo
ESP-WROOM-01 ESP-WROOM-02 ESP-WROOM-02-BREAK ESP-WROOM-02-BREAK1-ESP-WROOM-02-BREAK5 ESP-WROOM-03-ESP-WROOM-06 = PCR-Module
FAN FAN1-FAN5 = con-molex; MF: MOLEX; MPN: 22-23-2031; OC_FARNELL: 1462950; OC_NEWARK: 30C0862
FAN_ON FAN_ON1-FAN_ON5 = jumper
HEATER_POWER HEATER_POWER1-HEATER_POWER5 HEATER_TEMP HEATER_TEMP1-HEATER_TEMP5 = Seeed-Connector
IC1-IC12 = PCR-IC
IO0 IO1-IO5 MODE MODE1-MODE5 RST RST1-RST5 = Seeed-Switch
JACK JACK1-JACK5 U$3-U$14 U$17-U$24 U$27-U$34 U$37-U$44 U$47-U$54 U$57-U$60 = adafruit
PEL_BLK PEL_BLK1-PEL_BLK5 PEL_RED PEL_RED1-PEL_RED5 SERIAL1-SERIAL12 WELL_TEMP WELL_TEMP1-WELL_TEMP5 = pinhead
Q1 Q12 Q18 Q24 Q30 Q36 = transistor-power
Q2 Q3 Q10 Q11 Q16 Q17 Q22 Q23 Q28 Q29 Q34 Q35 = Seeed-Transistor; MPN: CJ2302
Q4-Q9 Q13-Q15 Q19-Q21 Q25-Q27 Q31-Q33 = Seeed-Transistor; MPN: S9013
R1-R11 R13 R14 R16 R18 R19 R22-R26 R28-R37 R40-R44 R46-R55 R58-R62 R64-R73 R76-R80 R82-R91 R94-R98 R100-R108 = Seeed-Resistor; MPN: RC0603JR-0710KL
R12 R15 R17 R20 R21 R27 R38 R39 R45 R56 R57 R63 R74 R75 R81 R92 R93 R99 = Seeed-Resistor; MPN: RC0603JR-071KL
RD1-RD12 RH RH1-RH5 RL1-RL12 = PCR-RCL
REG REG1-REG5 = Seeed-IC; MPN: CJT1117-3.3
RELAY RELAY1-RELAY5 = PCR-Switch
RT RT1-RT5 = Seeed-Resistor; MPN: RC0603FR-072KL
T1-T42 = testpad
U$1 U$2 U$15 U$16 U$25 U$26 U$35 U$36 U$45 U$46 U$55 U$56 = PCR-Logo

## Nets
3V1: C5.+ CP3.1 CP4.2 ESP-1.8 ESP-WROOM-01.P$1 ESP-WROOM-02-BREAK1.P$1 HEATER_TEMP1.1 IC3.P$1 IC3.P$15 IC3.P$16 IC4.P$1 IC4.P$6 MODE1.1 MODE1.4 R19.1 R23.1 R32.1 R35.1 RD3.2 REG1.2 REG1.TER RL4.1 SERIAL1.4 SERIAL2.1 T10.TP
3V2: C9.+ CP5.1 CP6.2 ESP-2.8 ESP-WROOM-02-BREAK2.P$1 ESP-WROOM-03.P$1 HEATER_TEMP2.1 IC5.P$1 IC5.P$15 IC5.P$16 IC6.P$1 IC6.P$6 MODE2.1 MODE2.4 R37.1 R41.1 R50.1 R53.1 RD5.2 REG2.2 REG2.TER RL6.1 SERIAL3.4 SERIAL5.1 T17.TP
3V3: C4.+ CP1.1 CP2.2 ESP-12.8 ESP-WROOM-02-BREAK.P$1 ESP-WROOM-02.P$1 HEATER_TEMP.1 IC1.P$1 IC1.P$6 IC2.P$1 IC2.P$15 IC2.P$16 MODE.1 MODE.4 R1.1 R2.1 R3.1 R4.1 RD1.2 REG.2 REG.TER RL1.1 SERIAL4.1 SERIAL6.4 T3.TP
3V4: C13.+ CP7.1 CP8.2 ESP-3.8 ESP-WROOM-02-BREAK3.P$1 ESP-WROOM-04.P$1 HEATER_TEMP3.1 IC7.P$1 IC7.P$15 IC7.P$16 IC8.P$1 IC8.P$6 MODE3.1 MODE3.4 R55.1 R59.1 R68.1 R71.1 RD7.2 REG3.2 REG3.TER RL8.1 SERIAL7.4 SERIAL8.1 T24.TP
3V5: C17.+ CP9.1 CP10.2 ESP-4.8 ESP-WROOM-02-BREAK4.P$1 ESP-WROOM-05.P$1 HEATER_TEMP4.1 IC9.P$1 IC9.P$15 IC9.P$16 IC10.P$1 IC10.P$6 MODE4.1 MODE4.4 R73.1 R77.1 R86.1 R89.1 RD9.2 REG4.2 REG4.TER RL10.1 SERIAL9.4 SERIAL10.1 T31.TP
3V6: C21.+ CP11.1 CP12.2 ESP-5.8 ESP-WROOM-02-BREAK5.P$1 ESP-WROOM-06.P$1 HEATER_TEMP5.1 IC11.P$1 IC11.P$15 IC11.P$16 IC12.P$1 IC12.P$6 MODE5.1 MODE5.4 R91.1 R95.1 R104.1 R107.1 RD11.2 REG5.2 REG5.TER RL12.1 SERIAL11.4 SERIAL12.1 T38.TP
12V: ATX.10 ATX.11 C3.P$P D1.2 D2.2 FAN.2 HEATER_POWER.1 JACK.TIP R13.2 REG.3 RELAY.P$2 RELAY.P$4 RELAY.P$6
12V1: ATX1.10 ATX1.11 C6.P$P D3.2 D4.2 FAN1.2 HEATER_POWER1.1 JACK1.TIP R28.2 REG1.3 RELAY1.P$2 RELAY1.P$4 RELAY1.P$6
12V2: ATX2.10 ATX2.11 C10.P$P D5.2 D6.2 FAN2.2 HEATER_POWER2.1 JACK2.TIP R46.2 REG2.3 RELAY2.P$2 RELAY2.P$4 RELAY2.P$6
12V3: ATX3.10 ATX3.11 C14.P$P D7.2 D8.2 FAN3.2 HEATER_POWER3.1 JACK3.TIP R64.2 REG3.3 RELAY3.P$2 RELAY3.P$4 RELAY3.P$6
12V4: ATX4.10 ATX4.11 C18.P$P D9.2 D10.2 FAN4.2 HEATER_POWER4.1 JACK4.TIP R82.2 REG4.3 RELAY4.P$2 RELAY4.P$4 RELAY4.P$6
12V5: ATX5.10 ATX5.11 C22.P$P D11.2 D12.2 FAN5.2 HEATER_POWER5.1 JACK5.TIP R100.2 REG5.3 RELAY5.P$2 RELAY5.P$4 RELAY5.P$6
DIVIDED: C2.+ IC2.P$2 IC2.P$4 RD1.1 RD2.1
DIVIDED1: C8.+ IC3.P$2 IC3.P$4 RD3.1 RD4.1
DIVIDED2: C12.+ IC5.P$2 IC5.P$4 RD5.1 RD6.1
DIVIDED3: C16.+ IC7.P$2 IC7.P$4 RD7.1 RD8.1
DIVIDED4: C20.+ IC9.P$2 IC9.P$4 RD9.1 RD10.1
DIVIDED5: C24.+ IC11.P$2 IC11.P$4 RD11.1 RD12.1
DRDY: ESP-12.20 ESP-WROOM-02-BREAK.P$14 ESP-WROOM-02.P$14 IC2.P$12
DRDY1: ESP-1.20 ESP-WROOM-01.P$14 ESP-WROOM-02-BREAK1.P$14 IC3.P$12
DRDY2: ESP-2.20 ESP-WROOM-02-BREAK2.P$14 ESP-WROOM-03.P$14 IC5.P$12
DRDY3: ESP-3.20 ESP-WROOM-02-BREAK3.P$14 ESP-WROOM-04.P$14 IC7.P$12
DRDY4: ESP-4.20 ESP-WROOM-02-BREAK4.P$14 ESP-WROOM-05.P$14 IC9.P$12
DRDY5: ESP-5.20 ESP-WROOM-02-BREAK5.P$14 ESP-WROOM-06.P$14 IC11.P$12
EN: ESP-12.3 ESP-WROOM-02-BREAK.P$2 ESP-WROOM-02.P$2 R4.2
EN1: ESP-1.3 ESP-WROOM-01.P$2 ESP-WROOM-02-BREAK1.P$2 R32.2
EN2: ESP-2.3 ESP-WROOM-02-BREAK2.P$2 ESP-WROOM-03.P$2 R50.2
EN3: ESP-3.3 ESP-WROOM-02-BREAK3.P$2 ESP-WROOM-04.P$2 R68.2
EN4: ESP-4.3 ESP-WROOM-02-BREAK4.P$2 ESP-WROOM-05.P$2 R86.2
EN5: ESP-5.3 ESP-WROOM-02-BREAK5.P$2 ESP-WROOM-06.P$2 R104.2
FAN: ESP-12.18 ESP-WROOM-02-BREAK.P$8 ESP-WROOM-02.P$8 IO0.1 IO0.4 R2.2 R17.1 T5.TP
FAN1: ESP-1.18 ESP-WROOM-01.P$8 ESP-WROOM-02-BREAK1.P$8 IO1.1 IO1.4 R20.1 R23.2 T12.TP
FAN2: ESP-2.18 ESP-WROOM-02-BREAK2.P$8 ESP-WROOM-03.P$8 IO2.1 IO2.4 R38.1 R41.2 T19.TP
FAN3: ESP-3.18 ESP-WROOM-02-BREAK3.P$8 ESP-WROOM-04.P$8 IO3.1 IO3.4 R56.1 R59.2 T26.TP
FAN4: ESP-4.18 ESP-WROOM-02-BREAK4.P$8 ESP-WROOM-05.P$8 IO4.1 IO4.4 R74.1 R77.2 T33.TP
FAN5: ESP-5.18 ESP-WROOM-02-BREAK5.P$8 ESP-WROOM-06.P$8 IO5.1 IO5.4 R92.1 R95.2 T40.TP
GND: ATX.3 ATX.5 ATX.7 ATX.15 ATX.17 ATX.18 ATX.19 ATX.24 C1.1 C2.- C3.P$M C4.- CP1.2 CP2.1 ESP-12.15 ESP-WROOM-02-BREAK.P$9 ESP-WROOM-02-BREAK.P$13 ESP-WROOM-02-BREAK.P$18 ESP-WROOM-02.P$9 ESP-WROOM-02.P$13 ESP-WROOM-02.P$18 ESP-WROOM-02.P$19 FAN_ON.1 IC1.P$3 IC2.P$7 IC2.P$8 IC2.P$9 IO0.2 IO0.3 JACK.RING JACK.RING_SW Q1.S Q2.2 Q3.2 Q4.2 Q5.2 Q6.2 R5.1 R6.1 R7.1 R8.1 R9.1 R14.1 R16.1 R18.1 RD2.2 REG.1 RST.2 RST.3 RT.2 SERIAL4.4 SERIAL6.6 T4.TP WELL_TEMP.2
GND1: ATX1.3 ATX1.5 ATX1.7 ATX1.15 ATX1.17 ATX1.18 ATX1.19 ATX1.24 C5.- C6.P$M C7.1 C8.- CP3.2 CP4.1 ESP-1.15 ESP-WROOM-01.P$9 ESP-WROOM-01.P$13 ESP-WROOM-01.P$18 ESP-WROOM-01.P$19 ESP-WROOM-02-BREAK1.P$9 ESP-WROOM-02-BREAK1.P$13 ESP-WROOM-02-BREAK1.P$18 FAN_ON1.1 IC3.P$7 IC3.P$8 IC3.P$9 IC4.P$3 IO1.2 IO1.3 JACK1.RING JACK1.RING_SW Q7.2 Q8.2 Q9.2 Q10.2 Q11.2 Q12.S R22.1 R24.1 R25.1 R26.1 R29.1 R33.1 R34.1 R36.1 RD4.2 REG1.1 RST1.2 RST1.3 RT1.2 SERIAL1.6 SERIAL2.4 T11.TP WELL_TEMP1.2
GND2: ATX2.3 ATX2.5 ATX2.7 ATX2.15 ATX2.17 ATX2.18 ATX2.19 ATX2.24 C9.- C10.P$M C11.1 C12.- CP5.2 CP6.1 ESP-2.15 ESP-WROOM-02-BREAK2.P$9 ESP-WROOM-02-BREAK2.P$13 ESP-WROOM-02-BREAK2.P$18 ESP-WROOM-03.P$9 ESP-WROOM-03.P$13 ESP-WROOM-03.P$18 ESP-WROOM-03.P$19 FAN_ON2.1 IC5.P$7 IC5.P$8 IC5.P$9 IC6.P$3 IO2.2 IO2.3 JACK2.RING JACK2.RING_SW Q13.2 Q14.2 Q15.2 Q16.2 Q17.2 Q18.S R40.1 R42.1 R43.1 R44.1 R47.1 R51.1 R52.1 R54.1 RD6.2 REG2.1 RST2.2 RST2.3 RT2.2 SERIAL3.6 SERIAL5.4 T18.TP WELL_TEMP2.2
GND3: ATX3.3 ATX3.5 ATX3.7 ATX3.15 ATX3.17 ATX3.18 ATX3.19 ATX3.24 C13.- C14.P$M C15.1 C16.- CP7.2 CP8.1 ESP-3.15 ESP-WROOM-02-BREAK3.P$9 ESP-WROOM-02-BREAK3.P$13 ESP-WROOM-02-BREAK3.P$18 ESP-WROOM-04.P$9 ESP-WROOM-04.P$13 ESP-WROOM-04.P$18 ESP-WROOM-04.P$19 FAN_ON3.1 IC7.P$7 IC7.P$8 IC7.P$9 IC8.P$3 IO3.2 IO3.3 JACK3.RING JACK3.RING_SW Q19.2 Q20.2 Q21.2 Q22.2 Q23.2 Q24.S R58.1 R60.1 R61.1 R62.1 R65.1 R69.1 R70.1 R72.1 RD8.2 REG3.1 RST3.2 RST3.3 RT3.2 SERIAL7.6 SERIAL8.4 T25.TP WELL_TEMP3.2
GND4: ATX4.3 ATX4.5 ATX4.7 ATX4.15 ATX4.17 ATX4.18 ATX4.19 ATX4.24 C17.- C18.P$M C19.1 C20.- CP9.2 CP10.1 ESP-4.15 ESP-WROOM-02-BREAK4.P$9 ESP-WROOM-02-BREAK4.P$13 ESP-WROOM-02-BREAK4.P$18 ESP-WROOM-05.P$9 ESP-WROOM-05.P$13 ESP-WROOM-05.P$18 ESP-WROOM-05.P$19 FAN_ON4.1 IC9.P$7 IC9.P$8 IC9.P$9 IC10.P$3 IO4.2 IO4.3 JACK4.RING JACK4.RING_SW Q25.2 Q26.2 Q27.2 Q28.2 Q29.2 Q30.S R76.1 R78.1 R79.1 R80.1 R83.1 R87.1 R88.1 R90.1 RD10.2 REG4.1 RST4.2 RST4.3 RT4.2 SERIAL9.6 SERIAL10.4 T32.TP WELL_TEMP4.2
GND5: ATX5.3 ATX5.5 ATX5.7 ATX5.15 ATX5.17 ATX5.18 ATX5.19 ATX5.24 C21.- C22.P$M C23.1 C24.- CP11.2 CP12.1 ESP-5.15 ESP-WROOM-02-BREAK5.P$9 ESP-WROOM-02-BREAK5.P$13 ESP-WROOM-02-BREAK5.P$18 ESP-WROOM-06.P$9 ESP-WROOM-06.P$13 ESP-WROOM-06.P$18 ESP-WROOM-06.P$19 FAN_ON5.1 IC11.P$7 IC11.P$8 IC11.P$9 IC12.P$3 IO5.2 IO5.3 JACK5.RING JACK5.RING_SW Q31.2 Q32.2 Q33.2 Q34.2 Q35.2 Q36.S R94.1 R96.1 R97.1 R98.1 R101.1 R105.1 R106.1 R108.1 RD12.2 REG5.1 RST5.2 RST5.3 RT5.2 SERIAL11.6 SERIAL12.4 T39.TP WELL_TEMP5.2
HEATER: ESP-12.16 ESP-WROOM-02-BREAK.P$6 ESP-WROOM-02.P$6 R7.2 R15.1
HEATER1: ESP-1.16 ESP-WROOM-01.P$6 ESP-WROOM-02-BREAK1.P$6 R21.1 R24.2
HEATER2: ESP-2.16 ESP-WROOM-02-BREAK2.P$6 ESP-WROOM-03.P$6 R39.1 R42.2
HEATER3: ESP-3.16 ESP-WROOM-02-BREAK3.P$6 ESP-WROOM-04.P$6 R57.1 R60.2
HEATER4: ESP-4.16 ESP-WROOM-02-BREAK4.P$6 ESP-WROOM-05.P$6 R75.1 R78.2
HEATER5: ESP-5.16 ESP-WROOM-02-BREAK5.P$6 ESP-WROOM-06.P$6 R93.1 R96.2
HEATER_TEMP: HEATER_TEMP.2 IC2.P$5 RT.1
HEATER_TEMP1: HEATER_TEMP1.2 IC3.P$5 RT1.1
HEATER_TEMP2: HEATER_TEMP2.2 IC5.P$5 RT2.1
HEATER_TEMP3: HEATER_TEMP3.2 IC7.P$5 RT3.1
HEATER_TEMP4: HEATER_TEMP4.2 IC9.P$5 RT4.1
HEATER_TEMP5: HEATER_TEMP5.2 IC11.P$5 RT5.1
HIGH_TEMP: ESP-12.4 ESP-WROOM-02-BREAK.P$17 ESP-WROOM-02.P$17 IC1.P$4 MODE.2 MODE.3 R8.2 T7.TP
HIGH_TEMP1: ESP-1.4 ESP-WROOM-01.P$17 ESP-WROOM-02-BREAK1.P$17 IC4.P$4 MODE1.2 MODE1.3 R22.2 T14.TP
HIGH_TEMP2: ESP-2.4 ESP-WROOM-02-BREAK2.P$17 ESP-WROOM-03.P$17 IC6.P$4 MODE2.2 MODE2.3 R40.2 T21.TP
HIGH_TEMP3: ESP-3.4 ESP-WROOM-02-BREAK3.P$17 ESP-WROOM-04.P$17 IC8.P$4 MODE3.2 MODE3.3 R58.2 T28.TP
HIGH_TEMP4: ESP-4.4 ESP-WROOM-02-BREAK4.P$17 ESP-WROOM-05.P$17 IC10.P$4 MODE4.2 MODE4.3 R76.2 T35.TP
HIGH_TEMP5: ESP-5.4 ESP-WROOM-02-BREAK5.P$17 ESP-WROOM-06.P$17 IC12.P$4 MODE5.2 MODE5.3 R94.2 T42.TP
MODE: ESP-12.2 ESP-WROOM-02-BREAK.P$16 ESP-WROOM-02.P$16 R9.2
MODE1: ESP-1.2 ESP-WROOM-01.P$16 ESP-WROOM-02-BREAK1.P$16 R36.2
MODE2: ESP-2.2 ESP-WROOM-02-BREAK2.P$16 ESP-WROOM-03.P$16 R54.2
MODE3: ESP-3.2 ESP-WROOM-02-BREAK3.P$16 ESP-WROOM-04.P$16 R72.2
MODE4: ESP-4.2 ESP-WROOM-02-BREAK4.P$16 ESP-WROOM-05.P$16 R90.2
MODE5: ESP-5.2 ESP-WROOM-02-BREAK5.P$16 ESP-WROOM-06.P$16 R108.2
N$1: RL1.2 RL2.1
N$2: HEATER_POWER.2 Q2.3
N$3: HEATSINK.P$1 Q1.D RELAY.P$5
N$4: FAN.3 FAN_ON.2 Q3.3
N$5: Q1.G Q6.3 R13.1 R14.2
N$6: PEL_RED.1 RELAY.P$8
N$7: PEL_BLK.1 RELAY.P$1
N$8: Q3.1 R17.2 R18.2
N$9: HEATER_POWER1.2 Q10.3
N$10: FAN1.3 FAN_ON1.2 Q11.3
N$11: C7.2 IC3.P$6
N$12: IC4.P$2 RH1.1
N$13: Q10.1 R21.2 R25.2
N$14: HEATSINK1.P$1 Q12.D RELAY1.P$5
N$15: Q9.3 Q12.G R28.1 R29.2
N$16: Q9.1 R27.2
N$17: D3.1 Q7.3 RELAY1.P$3
N$18: D4.1 Q8.3 RELAY1.P$7
N$19: Q7.1 R30.2
N$20: Q8.1 R31.1
N$21: PEL_RED1.1 RELAY1.P$8
N$22: PEL_BLK1.1 RELAY1.P$1
N$23: RL3.1 RL4.2
N$24: Q11.1 R20.2 R26.2
N$25: HEATER_POWER2.2 Q16.3
N$26: FAN2.3 FAN_ON2.2 Q17.3
N$27: IC1.P$2 RH.1
N$28: C11.2 IC5.P$6
N$29: IC6.P$2 RH2.1
N$30: Q6.1 R12.2
N$31: Q16.1 R39.2 R43.2
N$32: Q2.1 R15.2 R16.2
N$33: D1.1 Q4.3 RELAY.P$3
N$34: Q4.1 R10.2
N$35: Q5.1 R11.1
N$36: D2.1 Q5.3 RELAY.P$7
N$37: HEATSINK2.P$1 Q18.D RELAY2.P$5
N$38: Q15.3 Q18.G R46.1 R47.2
N$39: Q15.1 R45.2
N$40: D5.1 Q13.3 RELAY2.P$3
N$41: D6.1 Q14.3 RELAY2.P$7
N$42: Q13.1 R48.2
N$43: Q14.1 R49.1
N$44: PEL_RED2.1 RELAY2.P$8
N$45: PEL_BLK2.1 RELAY2.P$1
N$46: RL5.1 RL6.2
N$47: Q17.1 R38.2 R44.2
N$48: HEATER_POWER3.2 Q22.3
N$49: FAN3.3 FAN_ON3.2 Q23.3
N$50: C15.2 IC7.P$6
N$51: IC8.P$2 RH3.1
N$52: Q22.1 R57.2 R61.2
N$53: HEATSINK3.P$1 Q24.D RELAY3.P$5
N$54: Q21.3 Q24.G R64.1 R65.2
N$55: Q21.1 R63.2
N$56: D7.1 Q19.3 RELAY3.P$3
N$57: D8.1 Q20.3 RELAY3.P$7
N$58: Q19.1 R66.2
N$59: Q20.1 R67.1
N$60: PEL_RED3.1 RELAY3.P$8
N$61: PEL_BLK3.1 RELAY3.P$1
N$62: RL7.1 RL8.2
N$63: Q23.1 R56.2 R62.2
N$64: HEATER_POWER4.2 Q28.3
N$65: FAN4.3 FAN_ON4.2 Q29.3
N$66: C19.2 IC9.P$6
N$67: IC10.P$2 RH4.1
N$68: Q28.1 R75.2 R79.2
N$69: HEATSINK4.P$1 Q30.D RELAY4.P$5
N$70: Q27.3 Q30.G R82.1 R83.2
N$71: Q27.1 R81.2
N$72: D9.1 Q25.3 RELAY4.P$3
N$73: D10.1 Q26.3 RELAY4.P$7
N$74: Q25.1 R84.2
N$75: Q26.1 R85.1
N$76: PEL_RED4.1 RELAY4.P$8
N$77: PEL_BLK4.1 RELAY4.P$1
N$78: RL9.1 RL10.2
N$79: Q29.1 R74.2 R80.2
N$80: HEATER_POWER5.2 Q34.3
N$81: FAN5.3 FAN_ON5.2 Q35.3
N$82: C23.2 IC11.P$6
N$83: IC12.P$2 RH5.1
N$84: Q34.1 R93.2 R97.2
N$85: HEATSINK5.P$1 Q36.D RELAY5.P$5
N$86: Q33.3 Q36.G R100.1 R101.2
N$87: Q33.1 R99.2
N$88: D11.1 Q31.3 RELAY5.P$3
N$89: D12.1 Q32.3 RELAY5.P$7
N$90: Q31.1 R102.2
N$91: Q32.1 R103.1
N$92: C1.2 IC2.P$6
N$93: PEL_RED5.1 RELAY5.P$8
N$94: PEL_BLK5.1 RELAY5.P$1
N$95: RL11.1 RL12.2
N$96: Q35.1 R92.2 R98.2
PEL_PWM: ESP-12.19 ESP-WROOM-02-BREAK.P$10 ESP-WROOM-02.P$10 R12.1
PEL_PWM1: ESP-1.19 ESP-WROOM-01.P$10 ESP-WROOM-02-BREAK1.P$10 R27.1
PEL_PWM2: ESP-2.19 ESP-WROOM-02-BREAK2.P$10 ESP-WROOM-03.P$10 R45.1
PEL_PWM3: ESP-3.19 ESP-WROOM-02-BREAK3.P$10 ESP-WROOM-04.P$10 R63.1
PEL_PWM4: ESP-4.19 ESP-WROOM-02-BREAK4.P$10 ESP-WROOM-05.P$10 R81.1
PEL_PWM5: ESP-5.19 ESP-WROOM-02-BREAK5.P$10 ESP-WROOM-06.P$10 R99.1
PEL_SWA: ESP-12.6 ESP-WROOM-02-BREAK.P$4 ESP-WROOM-02.P$4 R5.2 R10.1
PEL_SWA1: ESP-1.6 ESP-WROOM-01.P$4 ESP-WROOM-02-BREAK1.P$4 R30.1 R33.2
PEL_SWA2: ESP-2.6 ESP-WROOM-02-BREAK2.P$4 ESP-WROOM-03.P$4 R48.1 R51.2
PEL_SWA3: ESP-3.6 ESP-WROOM-02-BREAK3.P$4 ESP-WROOM-04.P$4 R66.1 R69.2
PEL_SWA4: ESP-4.6 ESP-WROOM-02-BREAK4.P$4 ESP-WROOM-05.P$4 R84.1 R87.2
PEL_SWA5: ESP-5.6 ESP-WROOM-02-BREAK5.P$4 ESP-WROOM-06.P$4 R102.1 R105.2
PEL_SWB: ESP-12.7 ESP-WROOM-02-BREAK.P$5 ESP-WROOM-02.P$5 R6.2 R11.2
PEL_SWB1: ESP-1.7 ESP-WROOM-01.P$5 ESP-WROOM-02-BREAK1.P$5 R31.2 R34.2
PEL_SWB2: ESP-2.7 ESP-WROOM-02-BREAK2.P$5 ESP-WROOM-03.P$5 R49.2 R52.2
PEL_SWB3: ESP-3.7 ESP-WROOM-02-BREAK3.P$5 ESP-WROOM-04.P$5 R67.2 R70.2
PEL_SWB4: ESP-4.7 ESP-WROOM-02-BREAK4.P$5 ESP-WROOM-05.P$5 R85.2 R88.2
PEL_SWB5: ESP-5.7 ESP-WROOM-02-BREAK5.P$5 ESP-WROOM-06.P$5 R103.2 R106.2
RESET: ESP-12.1 ESP-WROOM-02-BREAK.P$15 ESP-WROOM-02.P$15 R1.2 RST.1 RST.4 T6.TP
RESET1: ESP-1.1 ESP-WROOM-01.P$15 ESP-WROOM-02-BREAK1.P$15 R19.2 RST1.1 RST1.4 T13.TP
RESET2: ESP-2.1 ESP-WROOM-02-BREAK2.P$15 ESP-WROOM-03.P$15 R37.2 RST2.1 RST2.4 T20.TP
RESET3: ESP-3.1 ESP-WROOM-02-BREAK3.P$15 ESP-WROOM-04.P$15 R55.2 RST3.1 RST3.4 T27.TP
RESET4: ESP-4.1 ESP-WROOM-02-BREAK4.P$15 ESP-WROOM-05.P$15 R73.2 RST4.1 RST4.4 T34.TP
RESET5: ESP-5.1 ESP-WROOM-02-BREAK5.P$15 ESP-WROOM-06.P$15 R91.2 RST5.1 RST5.4 T41.TP
RXD: ESP-12.21 ESP-WROOM-02-BREAK.P$11 ESP-WROOM-02.P$11 SERIAL4.2 SERIAL6.3 T2.TP
RXD1: ESP-1.21 ESP-WROOM-01.P$11 ESP-WROOM-02-BREAK1.P$11 SERIAL1.3 SERIAL2.2 T9.TP
RXD2: ESP-2.21 ESP-WROOM-02-BREAK2.P$11 ESP-WROOM-03.P$11 SERIAL3.3 SERIAL5.2 T16.TP
RXD3: ESP-3.21 ESP-WROOM-02-BREAK3.P$11 ESP-WROOM-04.P$11 SERIAL7.3 SERIAL8.2 T23.TP
RXD4: ESP-4.21 ESP-WROOM-02-BREAK4.P$11 ESP-WROOM-05.P$11 SERIAL9.3 SERIAL10.2 T30.TP
RXD5: ESP-5.21 ESP-WROOM-02-BREAK5.P$11 ESP-WROOM-06.P$11 SERIAL11.3 SERIAL12.2 T37.TP
SCLK: ESP-12.5 ESP-WROOM-02-BREAK.P$3 ESP-WROOM-02.P$3 IC2.P$13
SCLK1: ESP-1.5 ESP-WROOM-01.P$3 ESP-WROOM-02-BREAK1.P$3 IC3.P$13
SCLK2: ESP-2.5 ESP-WROOM-02-BREAK2.P$3 ESP-WROOM-03.P$3 IC5.P$13
SCLK3: ESP-3.5 ESP-WROOM-02-BREAK3.P$3 ESP-WROOM-04.P$3 IC7.P$13
SCLK4: ESP-4.5 ESP-WROOM-02-BREAK4.P$3 ESP-WROOM-05.P$3 IC9.P$13
SCLK5: ESP-5.5 ESP-WROOM-02-BREAK5.P$3 ESP-WROOM-06.P$3 IC11.P$13
SDIO: ESP-12.17 ESP-WROOM-02-BREAK.P$7 ESP-WROOM-02.P$7 IC2.P$14 R3.2
SDIO1: ESP-1.17 ESP-WROOM-01.P$7 ESP-WROOM-02-BREAK1.P$7 IC3.P$14 R35.2
SDIO2: ESP-2.17 ESP-WROOM-02-BREAK2.P$7 ESP-WROOM-03.P$7 IC5.P$14 R53.2
SDIO3: ESP-3.17 ESP-WROOM-02-BREAK3.P$7 ESP-WROOM-04.P$7 IC7.P$14 R71.2
SDIO4: ESP-4.17 ESP-WROOM-02-BREAK4.P$7 ESP-WROOM-05.P$7 IC9.P$14 R89.2
SDIO5: ESP-5.17 ESP-WROOM-02-BREAK5.P$7 ESP-WROOM-06.P$7 IC11.P$14 R107.2
TXD: ESP-12.22 ESP-WROOM-02-BREAK.P$12 ESP-WROOM-02.P$12 SERIAL4.3 SERIAL6.2 T1.TP
TXD1: ESP-1.22 ESP-WROOM-01.P$12 ESP-WROOM-02-BREAK1.P$12 SERIAL1.2 SERIAL2.3 T8.TP
TXD2: ESP-2.22 ESP-WROOM-02-BREAK2.P$12 ESP-WROOM-03.P$12 SERIAL3.2 SERIAL5.3 T15.TP
TXD3: ESP-3.22 ESP-WROOM-02-BREAK3.P$12 ESP-WROOM-04.P$12 SERIAL7.2 SERIAL8.3 T22.TP
TXD4: ESP-4.22 ESP-WROOM-02-BREAK4.P$12 ESP-WROOM-05.P$12 SERIAL9.2 SERIAL10.3 T29.TP
TXD5: ESP-5.22 ESP-WROOM-02-BREAK5.P$12 ESP-WROOM-06.P$12 SERIAL11.2 SERIAL12.3 T36.TP
WELL_TEMP: IC2.P$3 RH.2 RL2.2 WELL_TEMP.1
WELL_TEMP1: IC3.P$3 RH1.2 RL3.2 WELL_TEMP1.1
WELL_TEMP2: IC5.P$3 RH2.2 RL5.2 WELL_TEMP2.1
WELL_TEMP3: IC7.P$3 RH3.2 RL7.2 WELL_TEMP3.1
WELL_TEMP4: IC9.P$3 RH4.2 RL9.2 WELL_TEMP4.1
WELL_TEMP5: IC11.P$3 RH5.2 RL11.2 WELL_TEMP5.1

## Tracks (layer width: path | path; a pad name or v marks a point on that pad's centre or on a via)
3V1  (via drill 0.6)
  Top 0.381: C5.+ 104,21.43 103.53,21.89 101.17,21.89 100.33,22.73 100.33,24.43 R23.1
  Top 0.406: IC4.P$1 113.16,83.02 | 113.16,83.02 IC4.P$6 115.21,83.02 115.55,82.68 v115.55,81.74 | ESP-1.8 106.84,70.68 106.77,70.76 | 107.12,74.78 RD3.2 107.12,74.6 106.38,73.86 106.1,73.86 | 107.12,74.78 RL4.1 | ESP-WROOM-01.P$1 122.95,43.89 | R35.1 126.12,75.82 127.92,75.82 | 107.12,74.78 107.01,74.68 | R23.1 102.8,23.85 R19.1 | REG1.TER 116.54,7.01 SERIAL1.4 116.5,12.34 MODE1.4 | SERIAL2.1 121.34,4.7 T10.TP | 127.92,75.82 128.48,75.82 129.21,75.08 129.21,73.46 128.91,73.15 R32.1 | 106.84,72.03 112.35,72.03 113.06,72.75 113.06,82.92 113.16,83.02 | v118.04,84.58 118.05,84.57 IC3.P$1 IC3.P$16 IC3.P$15 123.65,82.02 124.36,81.31 124.36,80.77 127.92,77.22 127.92,75.82
  Top 1.27: REG1.2 109.45,7.01 | 109.45,7.01 REG1.TER | 109.45,7.01 109.68,7.24 109.68,9.98 108.18,11.48 102.34,11.48 101.66,12.17 101.66,17.04 104,19.39 C5.+ 104.21,19.79 105.11,19.79 105.52,19.38 v105.52,17.75 | ESP-WROOM-02-BREAK1.P$1 125.39,47.75 CP4.2 125.39,44.55 124.73,43.89 122.95,43.89 ESP-WROOM-01.P$1 | ESP-1.8 106.84,72.03 106.84,72.16 CP3.1 106.1,73.86 103.96,76 HEATER_TEMP1.1
  Bottom 0.406: SERIAL2.1 119.64,3 118.42,3 117.91,3.5 117.91,8.38 SERIAL1.4 | v115.55,81.74 118.04,84.23 v118.04,84.58 | MODE1.4 118.04,14.75 118.04,19.03 MODE1.1
  Bottom 1.27: HEATER_TEMP1.1 97.36,71.61 97.36,68.81 | 97.36,68.81 97.36,59.16 95.51,57.3 95.51,19.89 97.64,17.75 v105.52,17.75 | ESP-WROOM-02-BREAK1.P$1 124.04,52.5 121.8,52.5 120.65,53.65 120.65,63.02 117.71,65.96 110.19,65.96 107.32,68.83 97.39,68.83 97.36,68.81
3V2  (via drill 0.6)
  Top 0.381: C9.+ 167,21.43 166.53,21.89 164.17,21.89 163.33,22.73 163.33,24.43 R41.1
  Top 0.406: IC6.P$1 176.16,83.02 | 176.16,83.02 IC6.P$6 178.21,83.02 178.55,82.68 v178.55,81.74 | ESP-2.8 169.84,70.68 169.76,70.76 | 170.12,74.78 RD5.2 170.12,74.6 169.38,73.86 169.1,73.86 | 170.12,74.78 RL6.1 | ESP-WROOM-03.P$1 185.95,43.89 | R53.1 189.12,75.82 190.92,75.82 | 170.12,74.78 170.01,74.68 | R41.1 165.8,23.85 R37.1 | REG2.TER 179.54,7.01 SERIAL3.4 179.5,12.34 MODE2.4 | SERIAL5.1 184.34,4.7 T17.TP | 190.92,75.82 191.48,75.82 192.21,75.08 192.21,73.46 191.91,73.15 R50.1 | 169.84,72.03 175.35,72.03 176.06,72.75 176.06,82.92 176.16,83.02 | v181.04,84.58 181.05,84.57 IC5.P$1 IC5.P$16 IC5.P$15 186.65,82.02 187.36,81.31 187.36,80.77 190.92,77.22 190.92,75.82
  Top 1.27: REG2.2 172.45,7.01 | 172.45,7.01 REG2.TER | 172.45,7.01 172.68,7.24 172.68,9.98 171.18,11.48 165.34,11.48 164.66,12.17 164.66,17.04 167,19.39 C9.+ 167.21,19.79 168.11,19.79 168.52,19.38 v168.52,17.75 | ESP-WROOM-02-BREAK2.P$1 188.39,47.75 CP6.2 188.39,44.55 187.73,43.89 185.95,43.89 ESP-WROOM-03.P$1 | ESP-2.8 169.84,72.03 169.84,72.16 CP5.1 169.1,73.86 166.96,76 HEATER_TEMP2.1
  Bottom 0.406: SERIAL5.1 182.64,3 181.42,3 180.91,3.5 180.91,8.38 SERIAL3.4 | v178.55,81.74 181.04,84.23 v181.04,84.58 | MODE2.4 181.04,14.75 181.04,19.03 MODE2.1
  Bottom 1.27: HEATER_TEMP2.1 160.36,71.61 160.36,68.81 | 160.36,68.81 160.36,59.16 158.51,57.3 158.51,19.89 160.64,17.75 v168.52,17.75 | ESP-WROOM-02-BREAK2.P$1 187.04,52.5 184.8,52.5 183.65,53.65 183.65,63.02 180.71,65.96 173.19,65.96 170.32,68.83 160.39,68.83 160.36,68.81
3V3  (via drill 0.6)
  Top 0.381: C4.+ 41.01,21.43 40.53,21.89 38.17,21.89 37.33,22.73 37.33,24.43 R2.1
  Top 0.406: IC1.P$1 50.16,83.02 | 50.16,83.02 IC1.P$6 52.21,83.02 52.55,82.68 v52.55,81.74 | ESP-12.8 43.84,70.68 43.77,70.76 | 44.12,74.78 RD1.2 44.12,74.6 43.38,73.86 43.1,73.86 | 44.12,74.78 RL1.1 | ESP-WROOM-02.P$1 59.95,43.89 | R3.1 63.12,75.82 64.92,75.82 | 44.12,74.78 44.01,74.68 | R2.1 39.8,23.85 R1.1 | REG.TER 53.54,7.01 SERIAL6.4 53.5,12.34 MODE.4 | SERIAL4.1 58.34,4.7 T3.TP | 64.92,75.82 65.48,75.82 66.21,75.08 66.21,73.46 65.91,73.15 R4.1 | 43.84,72.03 49.35,72.03 50.06,72.75 50.06,82.92 50.16,83.02 | v55.04,84.58 55.05,84.57 IC2.P$1 IC2.P$16 IC2.P$15 60.65,82.02 61.36,81.31 61.36,80.77 64.92,77.22 64.92,75.82
  Top 1.27: REG.2 46.45,7.01 | 46.45,7.01 REG.TER | 46.45,7.01 46.68,7.24 46.68,9.98 45.18,11.48 39.34,11.48 38.66,12.17 38.66,17.04 41.01,19.39 C4.+ 41.21,19.79 42.11,19.79 42.52,19.38 v42.52,17.75 | ESP-WROOM-02-BREAK.P$1 62.39,47.75 CP2.2 62.39,44.55 61.73,43.89 59.95,43.89 ESP-WROOM-02.P$1 | ESP-12.8 43.84,72.03 43.84,72.16 CP1.1 43.1,73.86 40.96,76 HEATER_TEMP.1
  Bottom 0.406: SERIAL4.1 56.64,3 55.42,3 54.91,3.5 54.91,8.38 SERIAL6.4 | v52.55,81.74 55.04,84.23 v55.04,84.58 | MODE.4 55.04,14.75 55.04,19.03 MODE.1
  Bottom 1.27: HEATER_TEMP.1 34.36,71.61 34.36,68.81 | 34.36,68.81 34.36,59.16 32.51,57.3 32.51,19.89 34.64,17.75 v42.52,17.75 | ESP-WROOM-02-BREAK.P$1 61.04,52.5 58.8,52.5 57.65,53.65 57.65,63.02 54.71,65.96 47.19,65.96 44.32,68.83 34.39,68.83 34.36,68.81
3V4  (via drill 0.6)
  Top 0.381: C13.+ 41.01,107.42 40.53,107.89 38.17,107.89 37.33,108.73 37.33,110.44 R59.1
  Top 0.406: IC8.P$1 50.16,169.02 | 50.16,169.02 IC8.P$6 52.21,169.02 52.55,168.68 v52.55,167.74 | ESP-3.8 43.84,156.68 43.77,156.76 | 44.12,160.78 RD7.2 44.12,160.6 43.38,159.86 43.1,159.86 | 44.12,160.78 RL8.1 | ESP-WROOM-04.P$1 59.95,129.89 | R71.1 63.12,161.82 64.92,161.82 | 44.12,160.78 44.01,160.68 | R59.1 39.8,109.85 R55.1 | REG3.TER 53.54,93.01 SERIAL7.4 53.5,98.33 MODE3.4 | SERIAL8.1 58.34,90.7 T24.TP | 64.92,161.82 65.48,161.82 66.21,161.08 66.21,159.46 65.91,159.15 R68.1 | 43.84,158.03 49.35,158.03 50.06,158.75 50.06,168.92 50.16,169.02 | v55.04,170.58 55.05,170.57 IC7.P$1 IC7.P$16 IC7.P$15 60.65,168.02 61.36,167.31 61.36,166.77 64.92,163.22 64.92,161.82
  Top 1.27: REG3.2 46.45,93.01 | 46.45,93.01 REG3.TER | 46.45,93.01 46.68,93.24 46.68,95.98 45.18,97.48 39.34,97.48 38.66,98.17 38.66,103.04 41.01,105.39 C13.+ 41.21,105.79 42.11,105.79 42.52,105.38 v42.52,103.75 | ESP-WROOM-02-BREAK3.P$1 62.39,133.75 CP8.2 62.39,130.55 61.73,129.89 59.95,129.89 ESP-WROOM-04.P$1 | ESP-3.8 43.84,158.03 43.84,158.16 CP7.1 43.1,159.86 40.96,162 HEATER_TEMP3.1
  Bottom 0.406: SERIAL8.1 56.64,89 55.42,89 54.91,89.5 54.91,94.38 SERIAL7.4 | v52.55,167.74 55.04,170.23 v55.04,170.58 | MODE3.4 55.04,100.75 55.04,105.03 MODE3.1
  Bottom 1.27: HEATER_TEMP3.1 34.36,157.61 34.36,154.81 | 34.36,154.81 34.36,145.16 32.51,143.3 32.51,105.89 34.64,103.75 v42.52,103.75 | ESP-WROOM-02-BREAK3.P$1 61.04,138.5 58.8,138.5 57.65,139.65 57.65,149.02 54.71,151.96 47.19,151.96 44.32,154.83 34.39,154.83 34.36,154.81
3V5  (via drill 0.6)
  Top 0.381: C17.+ 104,107.42 103.53,107.89 101.17,107.89 100.33,108.73 100.33,110.44 R77.1
  Top 0.406: IC10.P$1 113.16,169.02 | 113.16,169.02 IC10.P$6 115.21,169.02 115.55,168.68 v115.55,167.74 | ESP-4.8 106.84,156.68 106.77,156.76 | 107.12,160.78 RD9.2 107.12,160.6 106.38,159.86 106.1,159.86 | 107.12,160.78 RL10.1 | ESP-WROOM-05.P$1 122.95,129.89 | R89.1 126.12,161.82 127.92,161.82 | 107.12,160.78 107.01,160.68 | R77.1 102.8,109.85 R73.1 | REG4.TER 116.54,93.01 SERIAL9.4 116.5,98.33 MODE4.4 | SERIAL10.1 121.34,90.7 T31.TP | 127.92,161.82 128.48,161.82 129.21,161.08 129.21,159.46 128.91,159.15 R86.1 | 106.84,158.03 112.35,158.03 113.06,158.75 113.06,168.92 113.16,169.02 | v118.04,170.58 118.05,170.57 IC9.P$1 IC9.P$16 IC9.P$15 123.65,168.02 124.36,167.31 124.36,166.77 127.92,163.22 127.92,161.82
  Top 1.27: REG4.2 109.45,93.01 | 109.45,93.01 REG4.TER | 109.45,93.01 109.68,93.24 109.68,95.98 108.18,97.48 102.34,97.48 101.66,98.17 101.66,103.04 104,105.39 C17.+ 104.21,105.79 105.11,105.79 105.52,105.38 v105.52,103.75 | ESP-WROOM-02-BREAK4.P$1 125.39,133.75 CP10.2 125.39,130.55 124.73,129.89 122.95,129.89 ESP-WROOM-05.P$1 | ESP-4.8 106.84,158.03 106.84,158.16 CP9.1 106.1,159.86 103.96,162 HEATER_TEMP4.1
  Bottom 0.406: SERIAL10.1 119.64,89 118.42,89 117.91,89.5 117.91,94.38 SERIAL9.4 | v115.55,167.74 118.04,170.23 v118.04,170.58 | MODE4.4 118.04,100.75 118.04,105.03 MODE4.1
  Bottom 1.27: HEATER_TEMP4.1 97.36,157.61 97.36,154.81 | 97.36,154.81 97.36,145.16 95.51,143.3 95.51,105.89 97.64,103.75 v105.52,103.75 | ESP-WROOM-02-BREAK4.P$1 124.04,138.5 121.8,138.5 120.65,139.65 120.65,149.02 117.71,151.96 110.19,151.96 107.32,154.83 97.39,154.83 97.36,154.81
3V6  (via drill 0.6)
  Top 0.381: C21.+ 167,107.42 166.53,107.89 164.17,107.89 163.33,108.73 163.33,110.44 R95.1